# Altium PCB PCB1.PcbDoc (part 1 of 3)
Units mm, origin at the board's own origin, x right, y up, seen from the top; angles counter-clockwise.
Board outline 72 x 48 mm, 6 copper layers (SIG1, GND1, SIG2, PWR, GND2, SIG3), stack 0.816 mm thick; 134 components, 203 nets, 720 pads, 397 vias.
Unrouted connection lines stored in the file: 1.
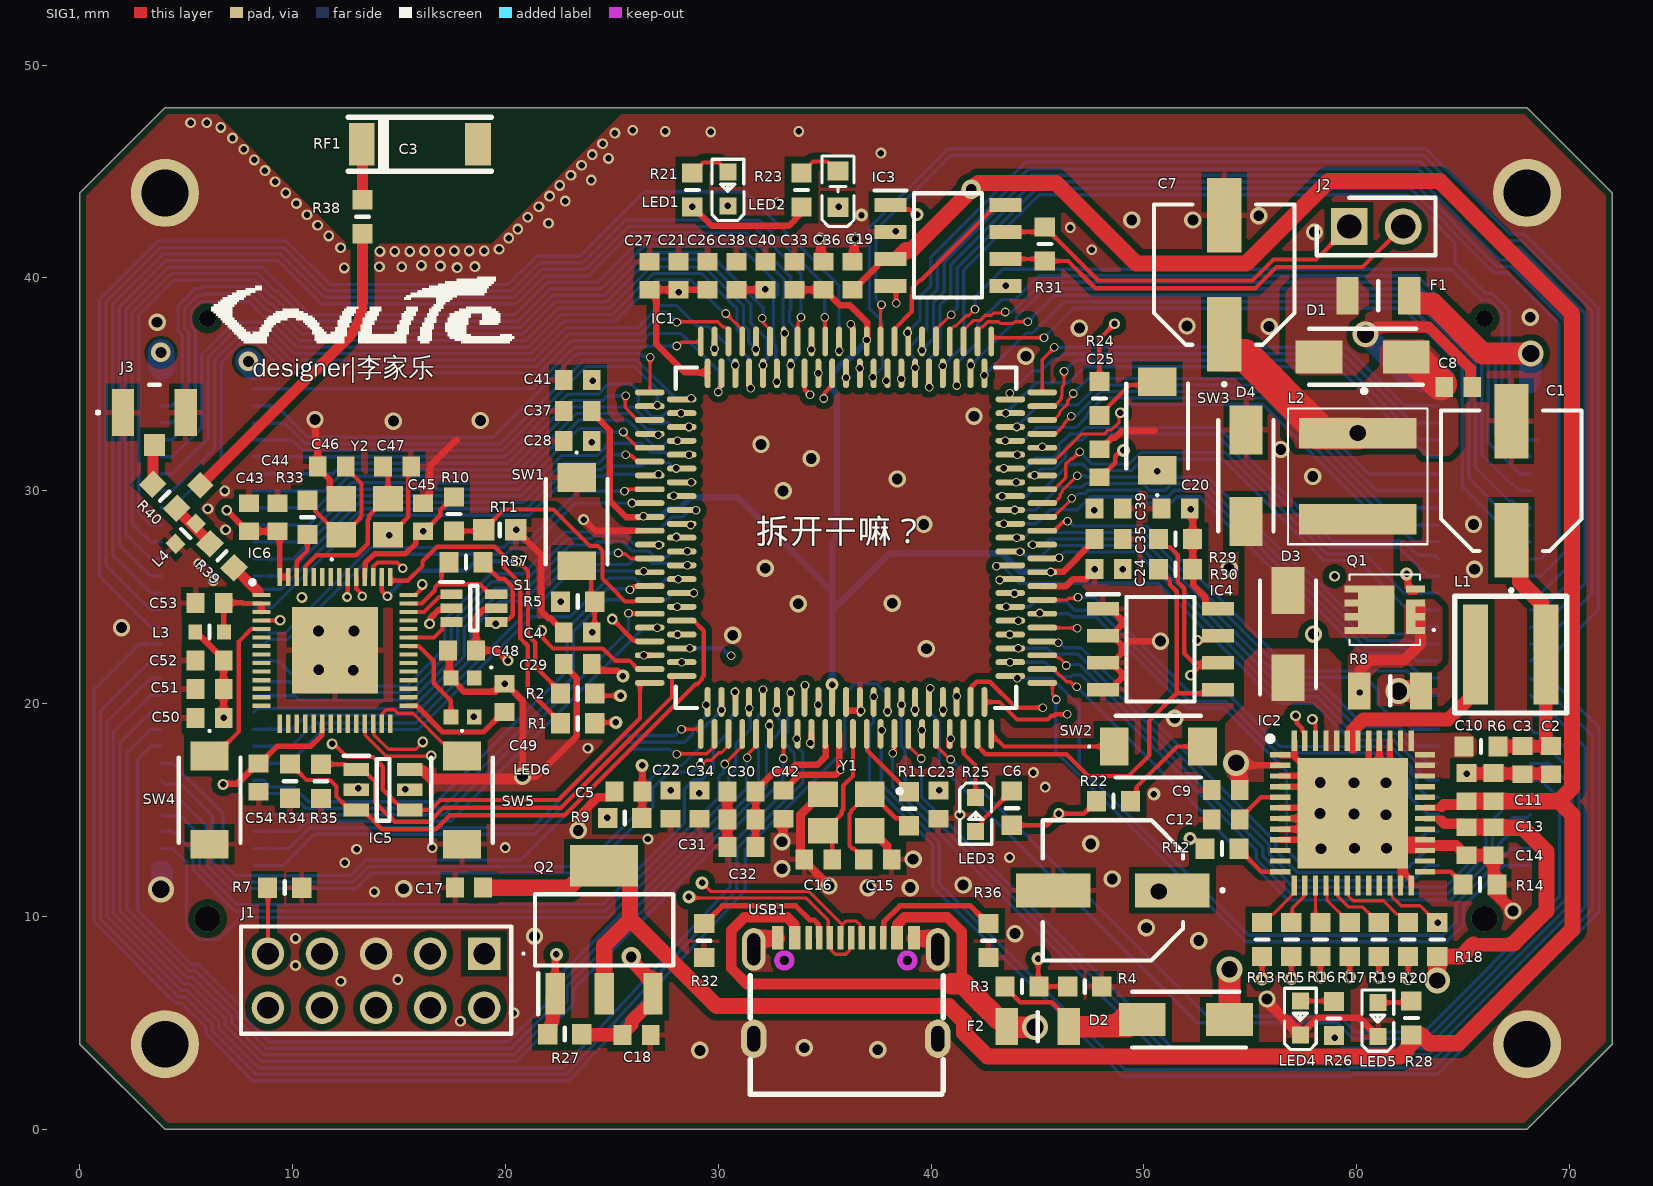
[diagram p0: SIG1 view]
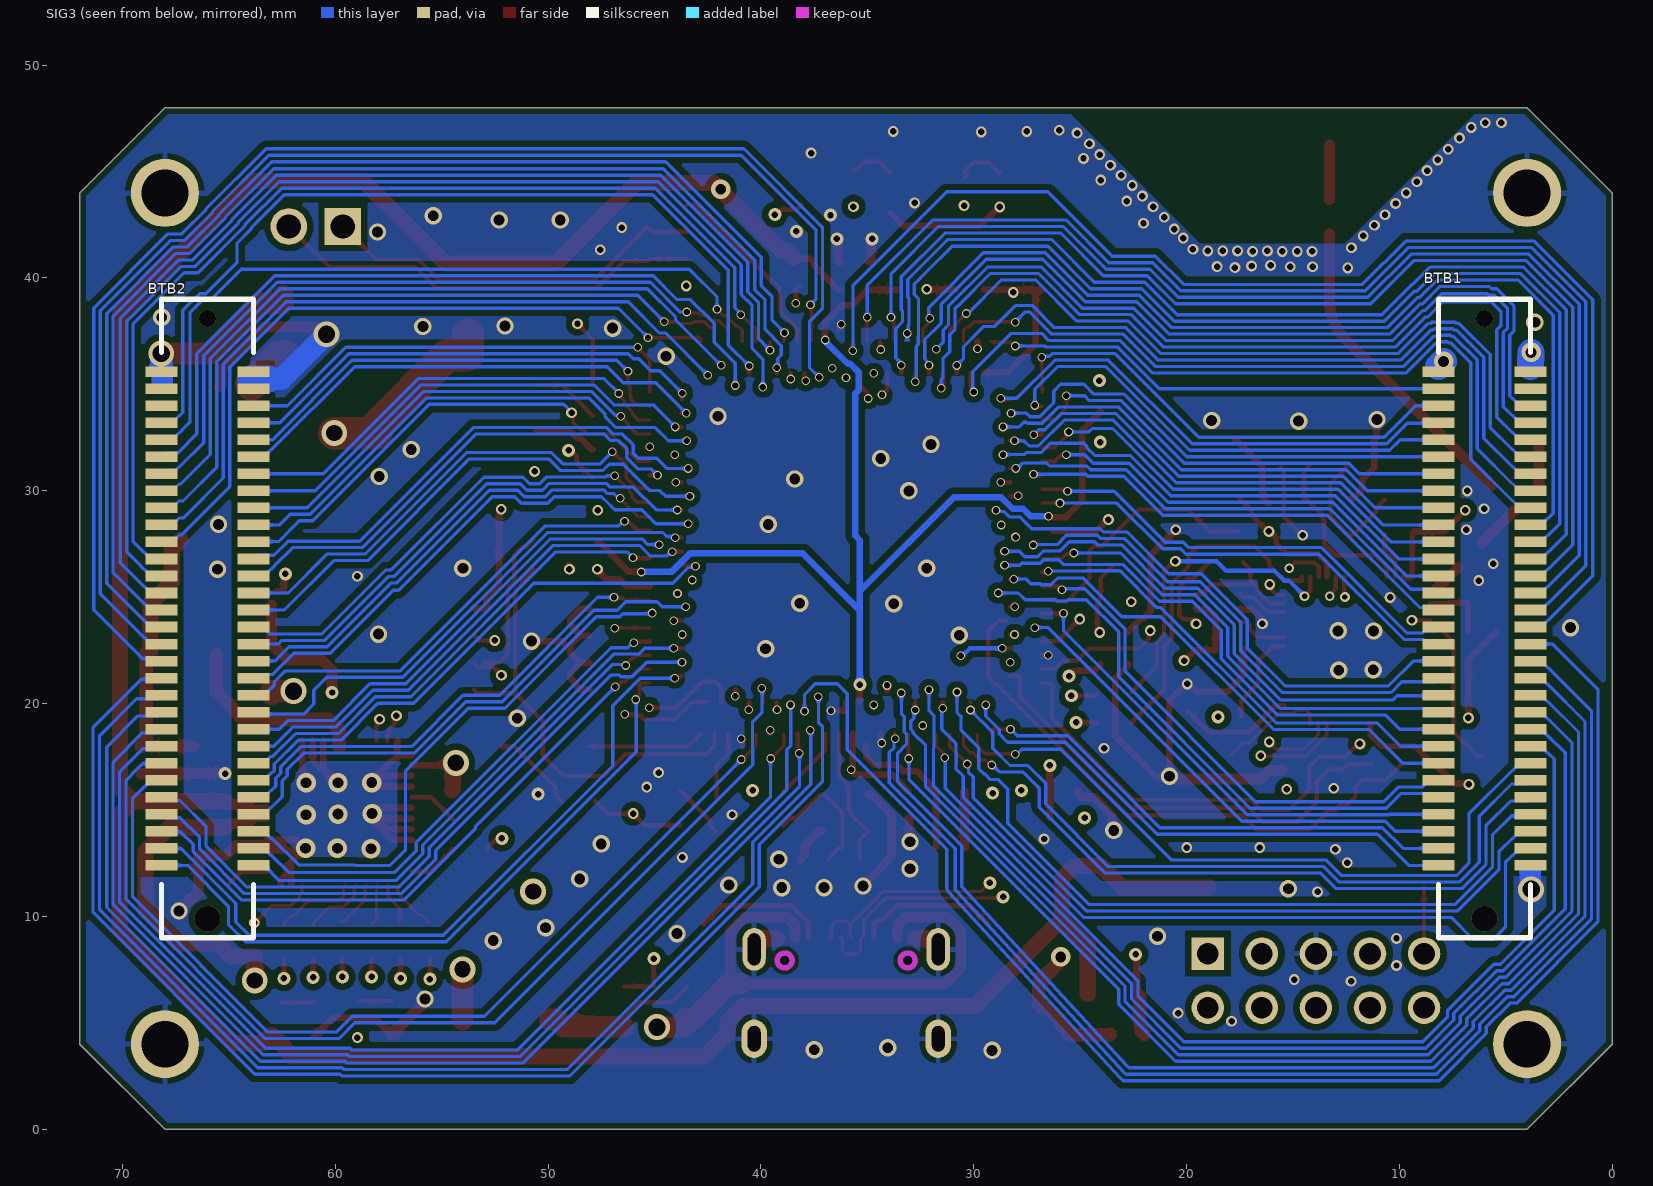
[diagram p1: SIG3 view, seen from below]
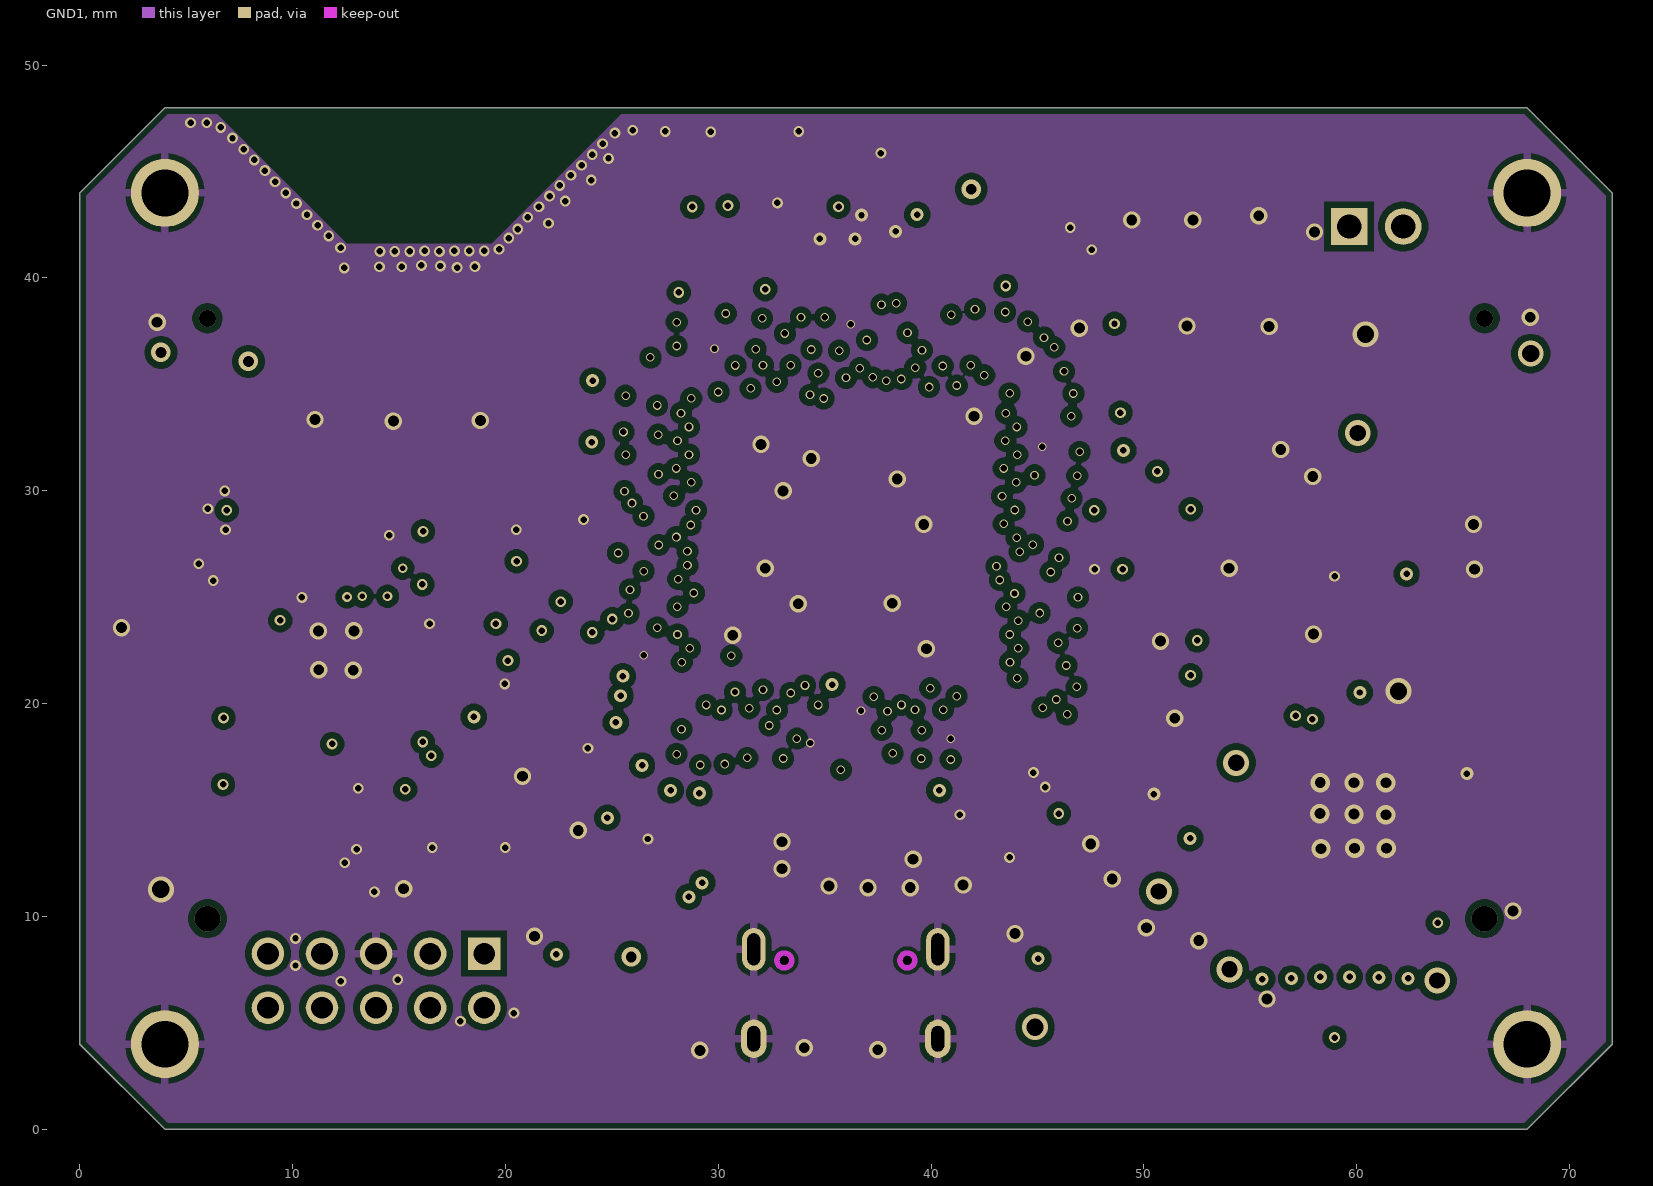
[diagram p2: GND1]
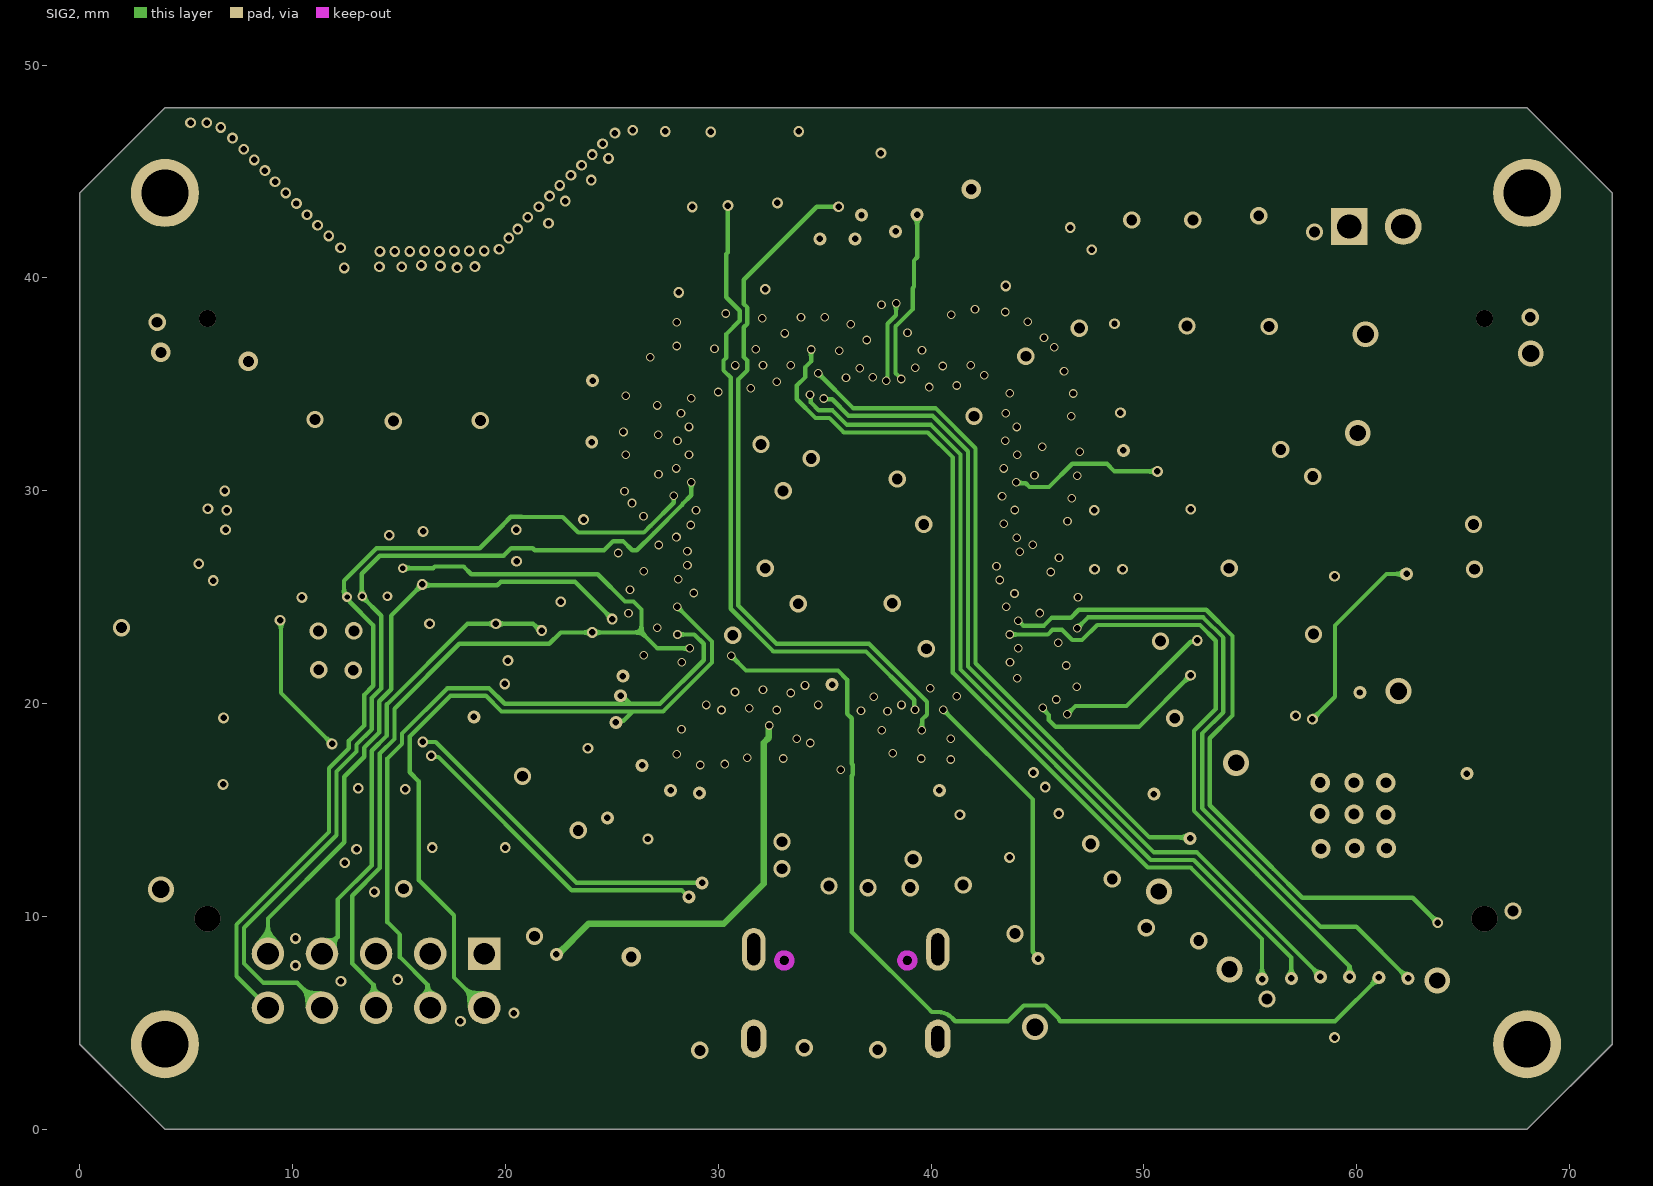
[diagram p3: SIG2]
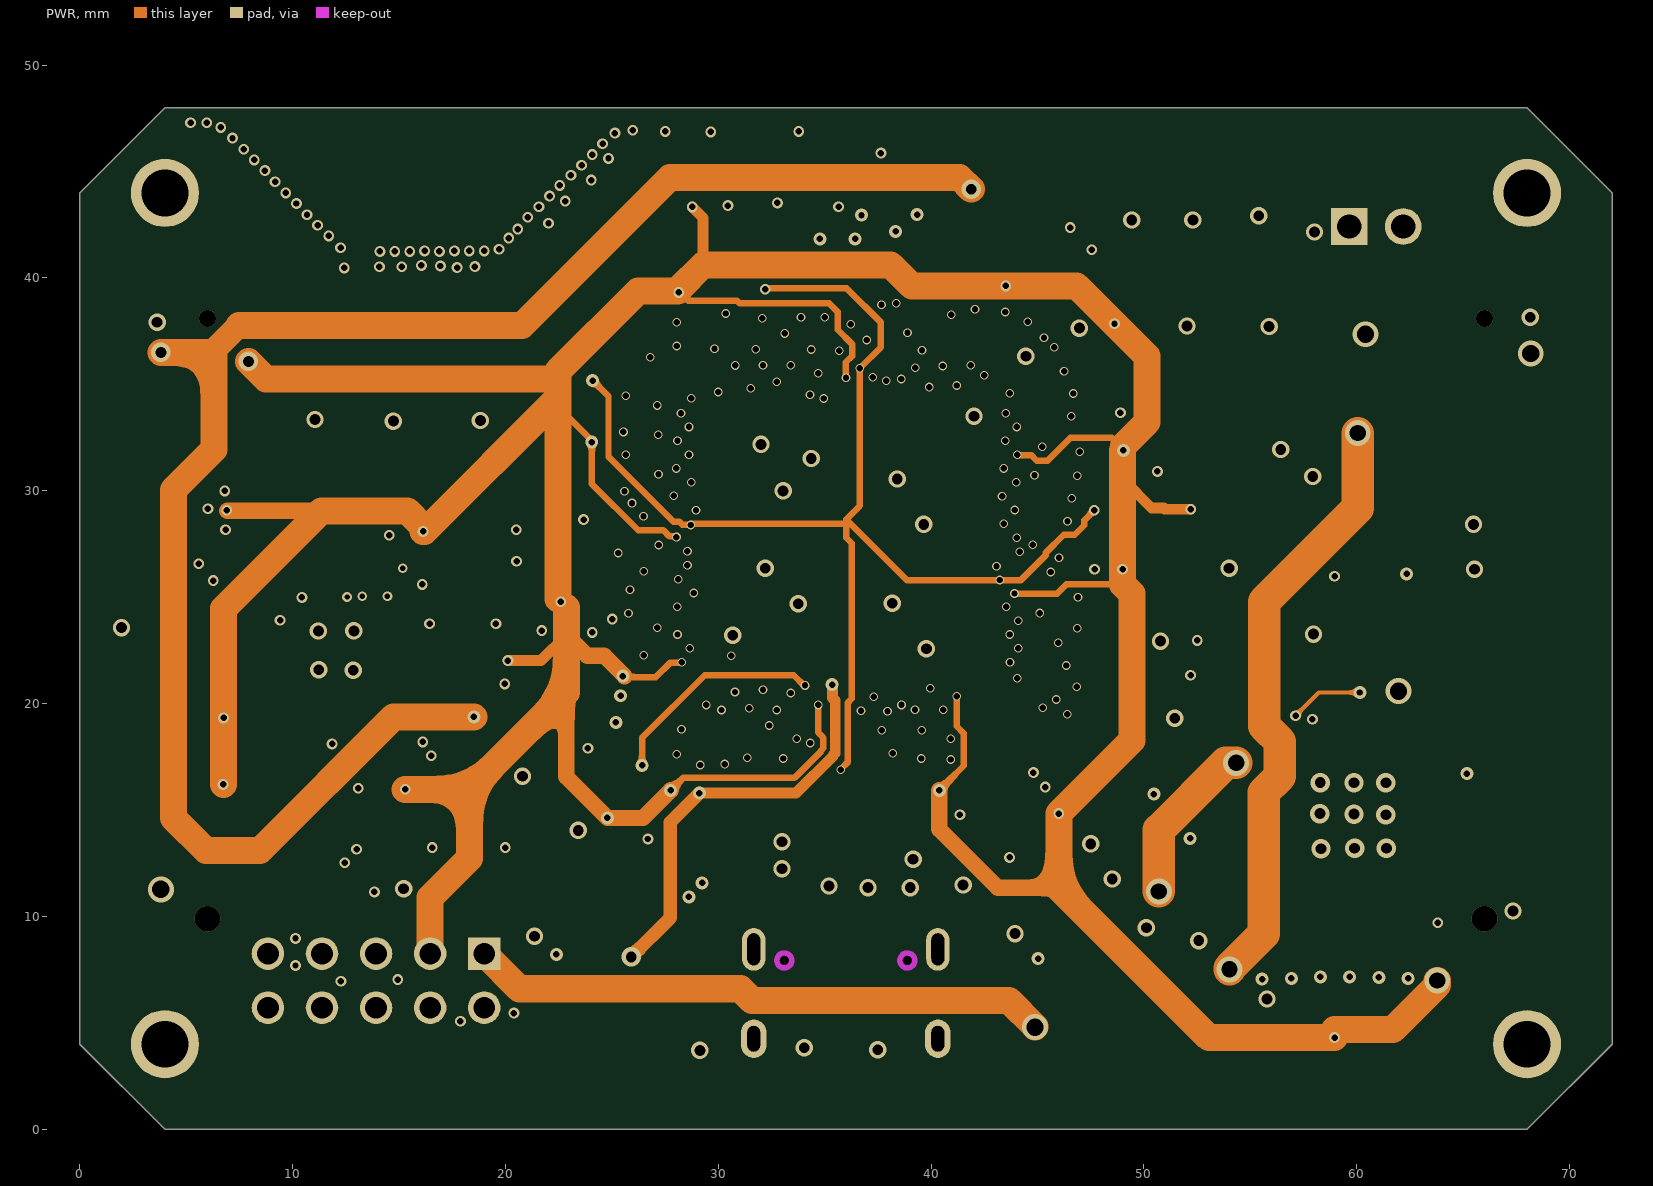
[diagram p4: PWR]
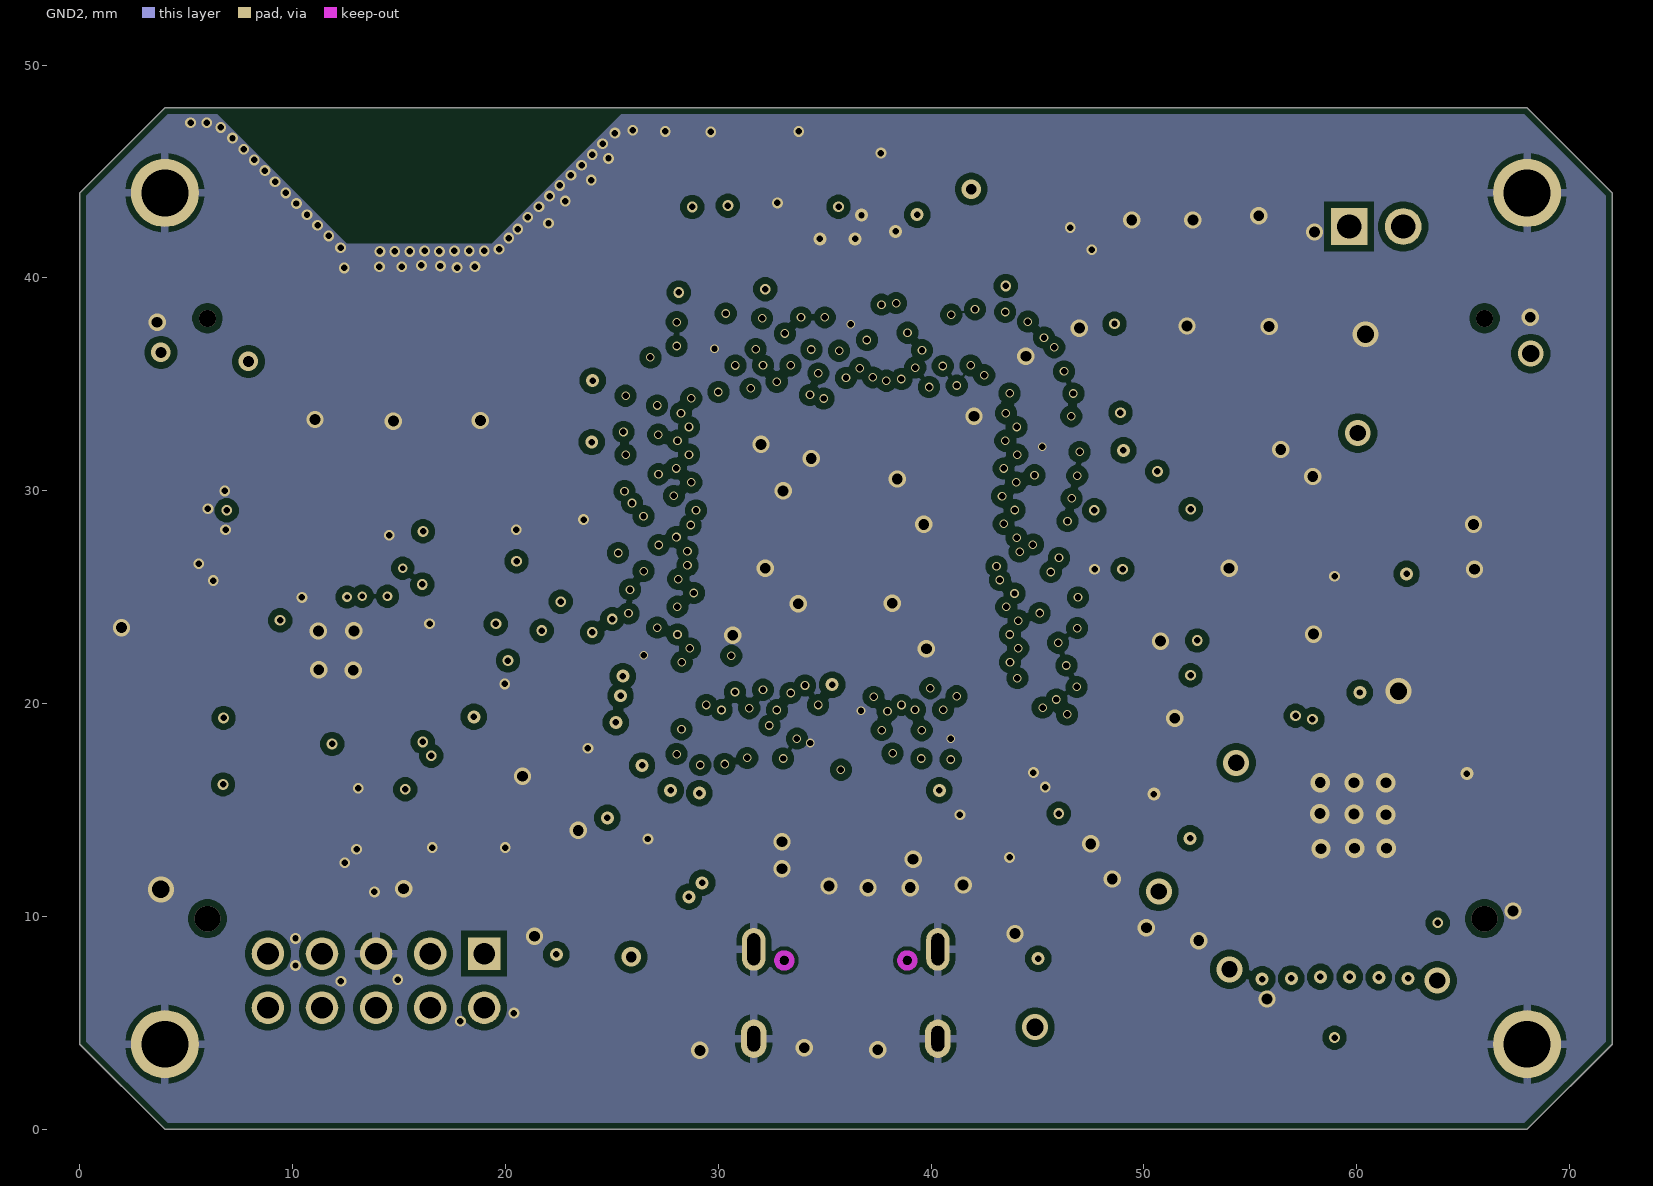
[diagram p5: GND2]

## Layer stack, top to bottom
Top Solder: solder mask 0.0102, Solder Resist, Dk 3.5
SIG1: signal copper 0.035
Dielectric 2: prepreg 0.0711, PP-006, Dk 4.1
GND1: signal copper 0.035
Dielectric 3: prepreg 0.0711, PP-006, Dk 4.1
SIG2: signal copper 0.0356
Dielectric 1: dielectric 0.32, FR-4, Dk 4.8
PWR: signal copper 0.0356
Dielectric 4: prepreg 0.0711, PP-006, Dk 4.1
GND2: signal copper 0.035
Dielectric 5: prepreg 0.0711, PP-006, Dk 4.1
SIG3: signal copper 0.035
Bottom Solder: solder mask 0.0102, Solder Resist, Dk 3.5

## Board outline
4,0 0,4 0,44 4,48 68,48 72,44 72,4 68,0

## Design rules (kind name [scope] priority, off if disabled: settings)
AcuteAngle [All] p1: minimum=3.00000000000000E+0001 checktracksonly=TRUE
AssemblyTestPointUsage [All] p1 off:
AssemblyTestpoint [All] p1 off: testpointundercomponent=TRUE minsize=1.016 maxsize=2.54 preferedsize=1.524 minholesize=0 maxholesize=1.016 preferedholesize=0.813 testpointgrid=0.025 usegrid=TRUE gridtolerance=0 allowsidetop=TRUE allowsidebottom=TRUE
BoardOutlineClearance [All] p1: gap=0.3 ignorepadtopadclearanceinfootprint=FALSE
Clearance ClearanceOvRide [InComponentClass('NetTie') vs InComponentClass('NetTie')] p1: gap=0.305 ignorepadtopadclearanceinfootprint=TRUE except(0.152: Arc-Arc Arc-Track Arc-SMDPad Track-Track Track-SMDPad SMDPad-SMDPad; 0.254: Arc-THPad Arc-Via Track-THPad Track-Via SMDPad-THPad SMDPad-Via THPad-THPad THPad-Via Via-Via)
Clearance KeepoutOvRide [IsKeepOut vs InComponentClass('Opto')] p2: gap=0 ignorepadtopadclearanceinfootprint=TRUE
Clearance UnplatedHoleClearanceOvRide [(HoleDiameter > 0) And (PadIsPlated = 'False') AND (HoleDiameter >= PadYSize_AllLayers)] p3: gap=0.3 ignorepadtopadclearanceinfootprint=FALSE except(0.4: Arc-Hole Track-Hole SMDPad-Hole THPad-Hole Via-Hole Fill-Hole Poly-Hole Region-Hole Text-Hole)
Clearance IPC,500V,Polymer,uncoatedLead [InNetClass('450vNet')] p4: gap=1.5 ignorepadtopadclearanceinfootprint=FALSE except(0.3: Arc-Hole Track-Hole SMDPad-Hole THPad-Hole Via-Hole Fill-Hole Poly-Hole Region-Hole Text-Hole; 1: Arc-Arc Arc-Track Track-Track)
Clearance PowerTrace25mil [(InNetClass('PowerNet'))] p5: gap=0.635 ignorepadtopadclearanceinfootprint=FALSE except(0.152: Arc-Arc Arc-Track Arc-SMDPad Track-Track Track-SMDPad SMDPad-SMDPad; 0.254: Arc-THPad Arc-Via Track-THPad Track-Via SMDPad-THPad SMDPad-Via THPad-THPad THPad-Via Via-Via; 0.305: Arc-Text Arc-Hole Track-Text Track-Hole SMDPad-Text SMDPad-Hole THPad-Text THPad-Hole Via-Text Via-Hole Fill-Text Fill-Hole Poly-Text Poly-Hole Region-Text Region-Hole Text-Text Text-Hole)
Clearance 450V_Clearance [InNetClass('450vNet')] p6 off: gap=3.2 ignorepadtopadclearanceinfootprint=TRUE
Clearance [All] p7: gap=0.305 ignorepadtopadclearanceinfootprint=TRUE except(0.152: Arc-Arc Arc-Track Arc-SMDPad Track-Track Track-SMDPad SMDPad-SMDPad; 0.254: Arc-THPad Arc-Via Track-THPad Track-Via SMDPad-THPad SMDPad-Via THPad-THPad THPad-Via Via-Via)
ComponentClearance ComponentOvRide [IsNetTieComponent] p1: gap=0 collisioncheckmode=3 verticalgap=0.254 showdistances=FALSE
ComponentClearance "450V clearance" [InComponentClass('450vPart')] p2: gap=1.5 collisioncheckmode=3 verticalgap=2540 showdistances=FALSE
ComponentClearance [All] p3: gap=0.305 collisioncheckmode=3 verticalgap=0.254 showdistances=FALSE
Creepage CreepageOvRide [InComponentClass('NetTie') vs InComponentClass('NetTie')] p1: checkdistance=0
Creepage 450V_Creepage [InNetClass('450vNet') vs InNetClass('All Nets')] p2 off: checkdistance=4.6 ignoreinternallayers=FALSE
Creepage [All] p3: checkdistance=0.13
FabricationTestPointUsage [All] p1 off: valid=0 allowmultiple=FALSE
FabricationTestpoint [All] p1 off: side=3 testpointundercomponent=TRUE minsize=1.016 maxsize=2.54 preferedsize=1.524 minholesize=0 maxholesize=1.016 preferedholesize=0.813 testpointgrid=0.025 allowsidetop=TRUE allowsidebottom=TRUE usegrid=TRUE gridtolerance=0
Height [All] p1: minheight=0 maxheight=40 prefheight=12.7
HoleSize HoleSizeOvRide [(HoleDiameter > 0) And (PadIsPlated = 'False') AND (HoleDiameter >= PadYSize_AllLayers)] p1: absolutevalues=TRUE maxlimit=999 minlimit=0.2 maxpercent=80.000 minpercent=20.000
HoleSize [All] p2: absolutevalues=TRUE maxlimit=6 minlimit=0.2 maxpercent=80.000 minpercent=20.000
HoleToHoleClearance SlotOvRide [All vs (HoleDiameter > 0) And (PadIsPlated = 'False') AND (HoleDiameter >= PadYSize_AllLayers)] p1: gap=0 allowstackedmicrovias=TRUE
HoleToHoleClearance [All] p2: gap=0.254 allowstackedmicrovias=TRUE
MinimumAnnularRing PadMinimumAnnularRing [NOT IsVia] p1: minimumring=0.25
MinimumAnnularRing ViaAnnularRing [All] p2: minimumring=0.05
MinimumSolderMaskSliver [All] p1: minsoldermaskwidth=0.076
PolygonConnect PolygonConnect_11 [All vs IsNamedPolygon('GND_L01_P013')] p1: thpad.connectstyle=Direct thpad.reliefconductorwidth=0.254 thpad.reliefentries=4 thpad.polygonreliefangle="90 Angle" thpad.airgapwidth=0.254 smdpad.connectstyle=Relief smdpad.reliefconductorwidth=0.254 smdpad.reliefentries=4 smdpad.polygonreliefangle="90 Angle" smdpad.airgapwidth=0.254 via.connectstyle=Direct via.reliefconductorwidth=0.254 via.reliefentries=4 via.polygonreliefangle="90 Angle" via.airgapwidth=0.254
PolygonConnect PolygonConnect_10 [All vs IsNamedPolygon('GND_L06_P017')] p2: thpad.connectstyle=Relief thpad.reliefconductorwidth=0.254 thpad.reliefentries=4 thpad.polygonreliefangle="90 Angle" thpad.airgapwidth=0.254 smdpad.connectstyle=Relief smdpad.reliefconductorwidth=0.254 smdpad.reliefentries=4 smdpad.polygonreliefangle="90 Angle" smdpad.airgapwidth=0.254 via.connectstyle=Direct via.reliefconductorwidth=0.254 via.reliefentries=4 via.polygonreliefangle="90 Angle" via.airgapwidth=0.254
PolygonConnect PolygonConnect_9 [All vs IsNamedPolygon('GND_L05_P012')] p3: thpad.connectstyle=Relief thpad.reliefconductorwidth=0.381 thpad.reliefentries=4 thpad.polygonreliefangle="90 Angle" thpad.airgapwidth=0.254 smdpad.connectstyle=Relief smdpad.reliefconductorwidth=0.381 smdpad.reliefentries=4 smdpad.polygonreliefangle="90 Angle" smdpad.airgapwidth=0.254 via.connectstyle=Direct via.reliefconductorwidth=0.381 via.reliefentries=4 via.polygonreliefangle="90 Angle" via.airgapwidth=0.254
PolygonConnect PolygonConnect_8 [All vs IsNamedPolygon('GND_L02_P011')] p4: thpad.connectstyle=Relief thpad.reliefconductorwidth=0.381 thpad.reliefentries=4 thpad.polygonreliefangle="90 Angle" thpad.airgapwidth=0.254 smdpad.connectstyle=Relief smdpad.reliefconductorwidth=0.381 smdpad.reliefentries=4 smdpad.polygonreliefangle="90 Angle" smdpad.airgapwidth=0.254 via.connectstyle=Direct via.reliefconductorwidth=0.381 via.reliefentries=4 via.polygonreliefangle="90 Angle" via.airgapwidth=0.254
PolygonConnect PolygonConnect_7 [All vs IsNamedPolygon('GND_L01_P013')] p5: thpad.connectstyle=Relief thpad.reliefconductorwidth=0.381 thpad.reliefentries=4 thpad.polygonreliefangle="90 Angle" thpad.airgapwidth=0.254 smdpad.connectstyle=Relief smdpad.reliefconductorwidth=0.381 smdpad.reliefentries=4 smdpad.polygonreliefangle="90 Angle" smdpad.airgapwidth=0.254 via.connectstyle=Direct via.reliefconductorwidth=0.381 via.reliefentries=4 via.polygonreliefangle="90 Angle" via.airgapwidth=0.254
PolygonConnect PolygonConnect_6 [All vs IsNamedPolygon('NETIC2_47_L01_P009')] p6: connectstyle=Direct reliefconductorwidth=0.254 reliefentries=4 polygonreliefangle="90 Angle" airgapwidth=0.254
PolygonConnect PolygonConnect_5 [All vs IsNamedPolygon('NETIC2_34_L01_P010')] p7: connectstyle=Direct reliefconductorwidth=0.254 reliefentries=4 polygonreliefangle="90 Angle" airgapwidth=0.254
PolygonConnect PolygonConnect_4 [All vs IsNamedPolygon('NETD3_2_L01_P000')] p8: connectstyle=Direct reliefconductorwidth=0.254 reliefentries=4 polygonreliefangle="90 Angle" airgapwidth=0.254
PolygonConnect PolygonConnect_3 [All vs IsNamedPolygon('NETD1_2_L01_P005')] p9: connectstyle=Direct reliefconductorwidth=0.254 reliefentries=4 polygonreliefangle="90 Angle" airgapwidth=0.254
PolygonConnect PolygonConnect_2 [All vs IsNamedPolygon('NETC7_1_L01_P004')] p10: connectstyle=Direct reliefconductorwidth=0.254 reliefentries=4 polygonreliefangle="90 Angle" airgapwidth=0.254
PolygonConnect PolygonConnect_1 [All vs IsNamedPolygon('NETC6_1_L01_P007')] p11: connectstyle=Direct reliefconductorwidth=0.254 reliefentries=4 polygonreliefangle="90 Angle" airgapwidth=0.254
PolygonConnect [All] p12: connectstyle=Relief reliefconductorwidth=0.381 reliefentries=4 polygonreliefangle="90 Angle" airgapwidth=0.254
RoutingVias [All] p1: holewidth=0.3 width=20 viastyle="Through Hole" minholewidth=0.3 minwidth=0.406 maxholewidth=2 maxwidth=3.048
SMDEntry [All] p1 off: side=TRUE corner=TRUE anyangle=FALSE
SMDToCorner [All] p1 off: distance=30000
ShortCircuit ShortCircuitOvRide [InComponentClass('NetTie') OR((HoleDiameter > 0) And (PadIsPlated = 'False') AND (HoleDiameter >= PadYSize_AllLayers)) vs InComponentClass('NetTie') OR ((HoleDiameter > 0) And (PadIsPlated = 'False') AND (HoleDiameter >= PadYSize_AllLayers))] p1: allowed=TRUE
ShortCircuit [All] p2: allowed=FALSE
SilkToSilkClearance [All] p1: silktosilkclearance=0.025
SilkToSolderMaskClearance [IsPad] p1: minsilkscreentomaskgap=0.025 clearancetoexposedcopper=TRUE
SolderMaskExpansion [All] p1: expansion=0.051 istentingtop=FALSE
UnRoutedNet [All] p1: checkbadconnections=TRUE
Width [All] p1: maxlimit=5.08 minlimit=0.102 preferedwidth=0.254
17 further rules are at their usual default settings.

## Components (designator, comment, footprint, x,y, rotation, side; value= is the part's Value field where it differs from the comment)
BTB1 "BTB_0.8mm_60Pin_Father" BTB_0.8MM_60PIN_F 6,24 r0 bottom
BTB2 "BTB_0.8mm_60Pin_Father" BTB_0.8MM_60PIN_F 66,24 r0 bottom
C1 "6SVQP100M" 16SVF180M 67.259,30.475 r0 top
C2 "22uF" CAPC1608X90N 69.113,17.35 r90 top
C3 "100nF" CAPC1608X90N 67.793,17.35 r90 top
C4 "100nF" CAPC1608X90N 23.393,23.344 r0 top
C5 "100nF" CAPC1608X90N 25.781,15.864 r180 top
C6 "100uF" 16SVF180M 48.539,11.228 r90 top
C7 "100uF" 16SVF180M 53.772,40.159 r0 top
C8 "100nF" CAPC1608X90N 64.77,34.876 r180 top
C9 "100nF" CAPC1608X90N 53.845,15.953 r0 top
C10 "4.7uF" CAPC1608X90N 65.151,16.08 r90 top
C11 "100nF" CAPC1608X90N 66.421,16.08 r90 top
C12 "100nF" CAPC1608X90N 53.845,14.556 r0 top
C13 "4.7uF" CAPC1608X90N 65.151,13.54 r90 top
C14 "100nF" CAPC1608X90N 66.421,13.54 r90 top
C15 "9pF" CAPC1608X90N 37.49,12.676 r0 top
C16 "9pF" CAPC1608X90N 34.697,12.676 r0 top
C17 "1uF" CAPC1608X90N 18.288,11.355 r180 top
C18 "2.2uF" CAPC1608X90N 26.162,4.421 r180 top
C19 "100nF" CAPC1608X90N 36.297,40.106 r90 top
C20 "100nF" CAPC1608X90N 51.486,29.161 r0 top
C21 "10uF" CAPC1608X90N 28.132,40.106 r270 top
C22 "100nF" CAPC1608X90N 27.762,15.259 r90 top
C23 "100nF" CAPC1608X90N 40.348,15.259 r90 top
C24 "100nF" CAPC1608X90N 48.336,26.316 r0 top
C25 "100nF" CAPC1608X90N 47.904,31.294 r270 top
C26 "100nF" CAPC1608X90N 29.493,40.106 r270 top
C27 "100nF" CAPC1608X90N 26.772,40.106 r270 top
C28 "100nF" CAPC1608X90N 23.393,32.336 r0 top
C29 "100nF" CAPC1608X90N 23.393,21.871 r0 top
C30 "10uF" CAPC1608X90N 31.09,15.864 r0 top
C31 "100nF" CAPC1608X90N 31.09,14.556 r0 top
C32 "1nF" CAPC1608X90N 31.09,13.26 r0 top
C33 "10uF" CAPC1608X90N 33.575,40.106 r270 top
C34 "100nF" CAPC1608X90N 29.108,15.259 r90 top
C35 "100nF" CAPC1608X90N 48.336,27.738 r180 top
C36 "100nF" CAPC1608X90N 34.936,40.106 r270 top
C37 "100nF" CAPC1608X90N 23.393,33.758 r0 top
C38 "2.2uF" CAPC1608X90N 30.854,40.106 r270 top
C39 "100nF" CAPC1608X90N 48.336,29.161 r180 top
C40 "100nF" CAPC1608X90N 32.214,40.106 r270 top
C41 "100nF" CAPC1608X90N 23.393,35.206 r0 top
C42 "100nF" CAPC1608X90N 33.071,15.259 r90 top
C43 "1uF" CAPC1608X90N 7.95,28.754 r270 top
C44 "10nF" CAPC1608X90N 9.296,28.754 r90 top
C45 "100nF" CAPC1608X90N 16.129,28.754 r90 top
C46 "15pF" CAPC1608X90N 11.836,31.142 r180 top
C47 "15pF" CAPC1608X90N 14.91,31.142 r180 top
C48 "100nF" CAPC1608X90N 17.958,22.506 r0 top
C49 "1uF" CAPC1608X90N 19.964,20.271 r270 top
C50 "10uF" CAPC1608X90N 6.096,19.331 r0 top
C51 "1uF" CAPC1608X90N 6.096,20.683 r0 top
C52 "100nF" CAPC1608X90N 6.096,22.036 r0 top
C53 "100nF" CAPC1608X90N 6.096,24.741 r0 top
C54 "100nF" CAPC1608X90N 8.407,16.527 r90 top
D1 "SS34A" DIOM5026X262N 60.274,36.298 r180 top
D2 "SS34A" DIOM5026X262N 51.968,5.158 r180 top
D3 "SS34A" DIOM5026X262N 56.769,23.268 r90 top
D4 "SMAJ28CA" DIONM5226X262N 54.788,30.71 r270 top
F1 "JK-nSMD050-30" RESC3116X65N 61.011,39.168 r0 top
F2 "JK-nSMD050-30" RESC3116X65N 45.009,4.827 r0 top
IC1 "S32K344EHT1MPBST" S32K344EHT1MPBST 36,27.8 r90 top
IC2 "TLF35584QVVS2" QFN50P700X700X90-49N-D 59.807,14.854 r0 top
IC3 "TJA1042T_3_1J" SOIC127P600X175-8N 40.792,41.53 r0 top
IC4 "AT24C02D-SSHM-B" SOIC127P600X175-8N 50.775,22.557 r0 top
IC5 "SN74LVC1G373DBVR" SOT95P280X145-6N 14.249,15.953 r0 top
IC6 "ESP32-S3FH4R2" QFN40P700X700X90-57N-D 11.989,22.506 r0 top
J1 "排针_P4*2_2.54" ZXPZ25425PZZ 18.999,8.256 r180 top
J2 "排针_P2_2.54" HDRV2W66P0X254_1X2_508X250X880P 59.639,42.419 r0 top
J3 "BWIPX-1-001E" BWIPX1001E 3.505,33.682 r270 top
L1 "XAL5050-223MEC" XAL5030 67.234,22.303 r0 top
L2 "XAL6060-223MEC" XAL6060822MEB 60.046,31.142 r270 top
L3 "2.4nH" LQM18FN100M00D 6.096,23.369 r0 top
L4 "3nH" LQM18FN100M00D 4.978,27.992 r45 top
LED1 "NCD0603R1" LED0603-RD 30.455,44.188 r90 top
LED2 "NCD0603G1" LED0603-RD_1 35.625,44.175 r90 top
LED3 "NCD0603B1" LED0603-RD 42.088,14.784 r270 top
LED4 "NCD0603W1" LED0603-RD 57.353,5.234 r90 top
LED5 "NCD0603W1" LED0603-RD 60.995,5.158 r90 top
LED6 "WS2812B-2020" WS2812B2020 17.983,20.296 r90 top
Q1 "IPZ40N04S5L-7R4" IPZ40N04S5L7R4ATMA1 61.316,24.411 r90 top
Q2 "BCP56-16TX" SOT230P700X180-4N 24.638,9.374 r90 top
R1 "0Ω" RESC1608X55N 23.393,19.077 r180 top
R2 "0Ω" RESC1608X55N 23.393,20.474 r180 top
R3 "6.2K" RESC1608X55N 44.272,6.707 r0 top
R4 "10K" RESC1608X55N 47.219,6.707 r0 top
R5 "10K" RESC1608X55N 23.393,24.792 r180 top
R6 "0Ω" RESC1608X55N 65.837,17.985 r0 top
R7 "10K" RESC1608X55N 9.627,11.355 r180 top
R8 "0.05Ω" RESC3116X65N 61.57,20.601 r180 top
R9 "0Ω" RESC1608X55N 25.603,14.632 r0 top
R10 "10K" RESC1608X55N 17.577,28.907 r270 top
R11 "47Ω" RESC1608X55N 38.964,15.064 r270 top
R12 "100Ω" RESC1608X55N 53.67,13.184 r0 top
R13 "100Ω" RESC1608X55N 55.55,8.917 r90 top
R14 "NC" RESC1608X55N 65.786,11.508 r0 top
R15 "100Ω" RESC1608X55N 56.921,8.917 r90 top
R16 "100Ω" RESC1608X55N 58.293,8.917 r90 top
R17 "0Ω" RESC1608X55N 59.665,8.917 r90 top
R18 "1K" RESC1608X55N 63.779,8.917 r90 top
R19 "0Ω" RESC1608X55N 61.036,8.917 r90 top
R20 "0Ω" RESC1608X55N 62.408,8.917 r90 top
R21 "10K" RESC1608X55N 28.778,44.137 r270 top
R22 "4.7K" RESC1608X55N 48.565,15.419 r180 top
R23 "10K" RESC1608X55N 33.909,44.138 r270 top
R24 "4.7K" RESC1608X55N 47.904,34.342 r90 top
R25 "10K" RESC1608X55N 43.79,15.089 r270 top
R26 "10K" RESC1608X55N 58.928,5.208 r270 top
R27 "2.2K" RESC1608X55N 22.784,4.472 r0 top
R28 "10K" RESC1608X55N 62.56,5.234 r270 top
R29 "10K" RESC1608X55N 51.486,27.738 r0 top
R30 "10K" RESC1608X55N 51.486,26.316 r0 top
R31 "120Ω" RESC1608X55N 45.339,41.595 r90 top
R32 "5.1K" RESC1608X55N 29.337,8.866 r270 top
R33 "22Ω" RESC1608X55N 10.693,28.754 r90 top
R34 "10K" RESC1608X55N 9.881,16.359 r90 top
R35 "10K" RESC1608X55N 11.328,16.352 r90 top
R36 "5.1K" RESC1608X55N 42.697,8.866 r270 top
R37 "NC" RESC1608X55N 18.142,26.646 r0 top
R38 "0Ω" RESC1608X55N 13.284,42.878 r90 top
R39 "0Ω" RESC1608X55N 6.68,26.951 r135 top
R40 "0Ω" RESC1608X55N 3.988,29.745 r135 top
RF1 "CA-C03" CA-C03 15.265,48.161 r270 top
RT1 "NCP18XH103F03RB" THRMC1608X95N 19.736,28.17 r0 top
S1 "SGM3157" SOT65P230X110-6N 18.517,24.487 r0 top
SW1 "TS-1088-AR02016" TS1088AR02016 23.343,28.551 r270 top
SW2 "TS-1088-AR02016" TS1088AR02016 50.673,17.985 r0 top
SW3 "TS-1088-AR02016" TS1088AR02016 50.622,33.047 r90 top
SW4 "TS-1088-AR02016" TS1088AR02016 6.096,15.47 r270 top
SW5 "TS-1088-AR02016" TS1088AR02016 17.958,15.47 r270 top
USB1 "TYPE-C 16PIN 2MD(073)" USB-C-SMD_TYPE-C-6PIN-2MD-073 35.992,6.631 r0 top
Y1 "X322516MLB4SI" X322516MLB4SI 36.017,14.886 r180 top
Y2 "X322540MPB4SI" X322540MPB4SI 13.386,28.78 r0 top

## Footprints (in the part's own frame and the unit in brackets; to place one, negate y for a bottom-side part, rotate by r counter-clockwise, add the part's x,y. Pads: shape width x height; smd on the part's side, far side on the other; paste and mask are expansions set on the pad)
16SVF180M [mm]
  rect 1.6x3.5 smd: 1(0,-2.8) 2(0,2.8)
  silkscreen extent -3.3,-5.2 3.3,3.3, body extent -3.3,-3.65 3.3,3.65, height 5.98
BTB_0.8MM_60PIN_F [mm] "0.8单槽板对板公母座合高5.0，母座，60PIN"
  rect 1.5x0.5 smd: 1(2.16,11.6) 2(2.16,10.8) 3(2.16,10) 4(2.16,9.2) 5(2.16,8.4) 6(2.16,7.6) 7(2.16,6.8) 8(2.16,6) 9(2.16,5.2) 10(2.16,4.4) 11(2.16,3.6) 12(2.16,2.8) 13(2.16,2) 14(2.16,1.2) 15(2.16,0.4) 16(2.16,-0.4) 17(2.16,-1.2) 18(2.16,-2) 19(2.16,-2.8) 20(2.16,-3.6) 21(2.16,-4.4) 22(2.16,-5.2) 23(2.16,-6) 24(2.16,-6.8) 25(2.16,-7.6) 26(2.16,-8.4) 27(2.16,-9.2) 28(2.16,-10) 29(2.16,-10.8) 30(2.16,-11.6) 31(-2.16,-11.6) 32(-2.16,-10.8) 33(-2.16,-10) 34(-2.16,-9.2) 35(-2.16,-8.4) 36(-2.16,-7.6) 37(-2.16,-6.8) 38(-2.16,-6) 39(-2.16,-5.2) 40(-2.16,-4.4) 41(-2.16,-3.6) 42(-2.16,-2.8) 43(-2.16,-2) 44(-2.16,-1.2) 45(-2.16,-0.4) 46(-2.16,0.4) 47(-2.16,1.2) 48(-2.16,2) 49(-2.16,2.8) 50(-2.16,3.6) 51(-2.16,4.4) 52(-2.16,5.2) 53(-2.16,6) 54(-2.16,6.8) 55(-2.16,7.6) 56(-2.16,8.4) 57(-2.16,9.2) 58(-2.16,10) 59(-2.16,10.8) 60(-2.16,11.6)
  silkscreen extent -2.16,-15 2.16,15, body extent -3,-14.9 3,14.9, height 4.44
BWIPX1001E [mm]
  rect 2.2x1.05 smd: 1(0,-1.475) 3(0,1.475)
  rect 1.05x1 smd: 2(1.525,0)
  silkscreen extent -1.3,-2.7 0.05,0.25, body extent -1.3,-1.9 1.95,1.9, height 1.55
CA-C03 [mm]
  rect 2x1.2 smd: 1(1.87,-2.017) 2(1.87,3.444)
  silkscreen extent 0.6,-2.65 3.14,4.08
CAPC1608X90N [mm]
  rect 0.83x0.94 smd: 1(-0.66,0) 2(0.66,0)
  body extent -0.8,-0.4 0.8,0.4, height 0.9
DIOM5026X262N [mm]
  rect 2.2x1.55 smd: 1(-2.05,0) 2(2.05,0)
  silkscreen extent -2.83,-1.31 2.52,1.31, body extent -2.52,-1.31 2.52,1.31, height 2.62
DIONM5226X262N [mm]
  rect 2.3x1.55 smd: 1(-2.15,0) 2(2.15,0)
  silkscreen extent -2.61,-1.3 2.61,1.3, body extent -2.61,-1.3 2.61,1.3, height 2.31
HDRV2W66P0X254_1X2_508X250X880P [mm]
  rect 1.725x1.725 hole 1.15: 1(0,0)
  round 1.725 hole 1.15: 2(2.54,0)
  silkscreen extent -1.52,-1.35 4.06,1.35, body extent -1.27,-1.25 3.81,1.25, height 8.8
IPZ40N04S5L7R4ATMA1 [mm]
  rect 0.34x0.45 smd: 1(-0.975,-1.675) 2(-0.325,-1.675) 3(0.325,-1.675)
  rect 1.64x0.45 smd: 1(-0.325,-1.225)
  rect 0.34x0.9 smd: 4(0.975,-1.45)
  rect 2.29x1.71 smd: 5(0,0.4)
  rect 0.34x0.65 smd: 5(0.975,1.58) 6(0.325,1.58) 7(-0.325,1.58) 8(-0.975,1.58)
  silkscreen extent -1.65,-2.35 1.65,1.65
LED0603-RD [mm]
  rect 0.8x0.8 smd: 1(-0.799,0) 2(0.799,0)
  silkscreen extent -1.49,-0.75 1.39,0.76
LED0603-RD_1 [mm]
  rect 0.9x1 smd: 1(-0.85,0) 2(0.85,0)
  silkscreen extent -1.75,-0.75 1.55,0.75
LQM18FN100M00D [mm]
  rect 0.65x0.7 smd: 1(-0.675,0) 2(0.675,0)
  silkscreen extent 0,-0.3 0,0.3, body extent -0.8,-0.4 0.8,0.4, height 0.8
QFN40P700X700X90-57N-D [mm]
  rect 0.85x0.2 smd: 1(-3.45,2.6) 2(-3.45,2.2) 3(-3.45,1.8) 4(-3.45,1.4) 5(-3.45,1) 6(-3.45,0.6) 7(-3.45,0.2) 8(-3.45,-0.2) 9(-3.45,-0.6) 10(-3.45,-1) 11(-3.45,-1.4) 12(-3.45,-1.8) 13(-3.45,-2.2) 14(-3.45,-2.6) 29(3.45,-2.6) 30(3.45,-2.2) 31(3.45,-1.8) 32(3.45,-1.4) 33(3.45,-1) 34(3.45,-0.6) 35(3.45,-0.2) 36(3.45,0.2) 37(3.45,0.6) 38(3.45,1) 39(3.45,1.4) 40(3.45,1.8) 41(3.45,2.2) 42(3.45,2.6)
  rect 0.2x0.85 smd: 15(-2.6,-3.45) 16(-2.2,-3.45) 17(-1.8,-3.45) 18(-1.4,-3.45) 19(-1,-3.45) 20(-0.6,-3.45) 21(-0.2,-3.45) 22(0.2,-3.45) 23(0.6,-3.45) 24(1,-3.45) 25(1.4,-3.45) 26(1.8,-3.45) 27(2.2,-3.45) 28(2.6,-3.45) 43(2.6,3.45) 44(2.2,3.45) 45(1.8,3.45) 46(1.4,3.45) 47(1,3.45) 48(0.6,3.45) 49(0.2,3.45) 50(-0.2,3.45) 51(-0.6,3.45) 52(-1,3.45) 53(-1.4,3.45) 54(-1.8,3.45) 55(-2.2,3.45) 56(-2.6,3.45)
  rect 4.05x4.05 smd: 57(0,0)
  silkscreen extent -3.97,3.1 -3.78,3.3, body extent -3.55,-3.55 3.55,3.55, height 0.9
QFN50P700X700X90-49N-D [mm]
  rect 0.95x0.25 smd: 1(-3.4,2.75) 2(-3.4,2.25) 3(-3.4,1.75) 4(-3.4,1.25) 5(-3.4,0.75) 6(-3.4,0.25) 7(-3.4,-0.25) 8(-3.4,-0.75) 9(-3.4,-1.25) 10(-3.4,-1.75) 11(-3.4,-2.25) 12(-3.4,-2.75) 25(3.4,-2.75) 26(3.4,-2.25) 27(3.4,-1.75) 28(3.4,-1.25) 29(3.4,-0.75) 30(3.4,-0.25) 31(3.4,0.25) 32(3.4,0.75) 33(3.4,1.25) 34(3.4,1.75) 35(3.4,2.25) 36(3.4,2.75)
  rect 0.25x0.95 smd: 13(-2.75,-3.4) 14(-2.25,-3.4) 15(-1.75,-3.4) 16(-1.25,-3.4) 17(-0.75,-3.4) 18(-0.25,-3.4) 19(0.25,-3.4) 20(0.75,-3.4) 21(1.25,-3.4) 22(1.75,-3.4) 23(2.25,-3.4) 24(2.75,-3.4) 37(2.75,3.4) 38(2.25,3.4) 39(1.75,3.4) 40(1.25,3.4) 41(0.75,3.4) 42(0.25,3.4) 43(-0.25,3.4) 44(-0.75,3.4) 45(-1.25,3.4) 46(-1.75,3.4) 47(-2.25,3.4) 48(-2.75,3.4)
  rect 5.2x5.2 smd: 49(0,0)
  silkscreen extent -4,3.38 -3.75,3.62, body extent -3.55,-3.55 3.55,3.55, height 0.9
RESC1608X55N [mm]
  rect 0.9x0.95 smd: 1(-0.8,0) 2(0.8,0)
  silkscreen extent 0,-0.3 0,0.3, body extent -0.8,-0.4 0.8,0.4, height 0.55
RESC3116X65N [mm]
  rect 1.05x1.75 smd: 1(-1.45,0) 2(1.45,0)
  silkscreen extent 0,-0.69 0,0.69, body extent -1.55,-0.79 1.55,0.79, height 0.65
S32K344EHT1MPBST [mm]
  rrect100% 1.4x0.28 smd: 1(-9.22,6.825) 2(-7.72,6.5) 3(-9.22,6.175) 4(-7.72,5.85) 5(-9.22,5.525) 6(-7.72,5.2) 7(-9.22,4.875) 8(-7.72,4.55) 9(-9.22,4.225) 10(-7.72,3.9) 11(-9.22,3.575) 12(-7.72,3.25) 13(-9.22,2.925) 14(-7.72,2.6) 15(-9.22,2.275) 16(-7.72,1.95) 17(-9.22,1.625) 18(-7.72,1.3) 19(-9.22,0.975) 20(-7.72,0.65) 21(-9.22,0.325) 22(-7.72,0) 23(-9.22,-0.325) 24(-7.72,-0.65) 25(-9.22,-0.975) 26(-7.72,-1.3) 27(-9.22,-1.625) 28(-7.72,-1.95) 29(-9.22,-2.275) 30(-7.72,-2.6) 31(-9.22,-2.925) 32(-7.72,-3.25) 33(-9.22,-3.575) 34(-7.72,-3.9) 35(-9.22,-4.225) 36(-7.72,-4.55) 37(-9.22,-4.875) 38(-7.72,-5.2) 39(-9.22,-5.525) 40(-7.72,-5.85) 41(-9.22,-6.175) 42(-7.72,-6.5) 43(-9.22,-6.825) 87(9.22,-6.825) 88(7.72,-6.5) 89(9.22,-6.175) 90(7.72,-5.85) 91(9.22,-5.525) 92(7.72,-5.2) 93(9.22,-4.875) 94(7.72,-4.55) 95(9.22,-4.225) 96(7.72,-3.9) 97(9.22,-3.575) 98(7.72,-3.25) 99(9.22,-2.925) 100(7.72,-2.6) 101(9.22,-2.275) 102(7.72,-1.95) 103(9.22,-1.625) 104(7.72,-1.3) 105(9.22,-0.975) 106(7.72,-0.65) 107(9.22,-0.325) 108(7.72,0) 109(9.22,0.325) 110(7.72,0.65) 111(9.22,0.975) 112(7.72,1.3) 113(9.22,1.625) 114(7.72,1.95) 115(9.22,2.275) 116(7.72,2.6) 117(9.22,2.925) 118(7.72,3.25) 119(9.22,3.575) 120(7.72,3.9) 121(9.22,4.225) 122(7.72,4.55) 123(9.22,4.875) 124(7.72,5.2) 125(9.22,5.525) 126(7.72,5.85) 127(9.22,6.175) 128(7.72,6.5) 129(9.22,6.825)
  rrect100% 0.28x1.4 smd: 44(-6.825,-9.22) 45(-6.5,-7.72) 46(-6.175,-9.22) 47(-5.85,-7.72) 48(-5.525,-9.22) 49(-5.2,-7.72) 50(-4.875,-9.22) 51(-4.55,-7.72) 52(-4.225,-9.22) 53(-3.9,-7.72) 54(-3.575,-9.22) 55(-3.25,-7.72) 56(-2.925,-9.22) 57(-2.6,-7.72) 58(-2.275,-9.22) 59(-1.95,-7.72) 60(-1.625,-9.22) 61(-1.3,-7.72) 62(-0.975,-9.22) 63(-0.65,-7.72) 64(-0.325,-9.22) 65(0,-7.72) 66(0.325,-9.22) 67(0.65,-7.72) 68(0.975,-9.22) 69(1.3,-7.72) 70(1.625,-9.22) 71(1.95,-7.72) 72(2.275,-9.22) 73(2.6,-7.72) 74(2.925,-9.22) 75(3.25,-7.72) 76(3.575,-9.22) 77(3.9,-7.72) 78(4.225,-9.22) 79(4.55,-7.72) 80(4.875,-9.22) 81(5.2,-7.72) 82(5.525,-9.22) 83(5.85,-7.72) 84(6.175,-9.22) 85(6.5,-7.72) 86(6.825,-9.22) 130(6.825,9.22) 131(6.5,7.72) 132(6.175,9.22) 133(5.85,7.72) 134(5.525,9.22) 135(5.2,7.72) 136(4.875,9.22) 137(4.55,7.72) 138(4.225,9.22) 139(3.9,7.72) 140(3.575,9.22) 141(3.25,7.72) 142(2.925,9.22) 143(2.6,7.72) 144(2.275,9.22) 145(1.95,7.72) 146(1.625,9.22) 147(1.3,7.72) 148(0.975,9.22) 149(0.65,7.72) 150(0.325,9.22) 151(0,7.72) 152(-0.325,9.22) 153(-0.65,7.72) 154(-0.975,9.22) 155(-1.3,7.72) 156(-1.625,9.22) 157(-1.95,7.72) 158(-2.275,9.22) 159(-2.6,7.72) 160(-2.925,9.22) 161(-3.25,7.72) 162(-3.575,9.22) 163(-3.9,7.72) 164(-4.225,9.22) 165(-4.55,7.72) 166(-4.875,9.22) 167(-5.2,7.72) 168(-5.525,9.22) 169(-5.85,7.72) 170(-6.175,9.22) 171(-6.5,7.72) 172(-6.825,9.22)
  silkscreen extent -10.5,-8 8,8, body extent -9.5,-9.5 9.5,9.5, height 1.75
SOIC127P600X175-8N [mm]
  rect 1.5x0.65 smd: 1(-2.7,1.905) 2(-2.7,0.635) 3(-2.7,-0.635) 4(-2.7,-1.905) 5(2.7,-1.905) 6(2.7,-0.635) 7(2.7,0.635) 8(2.7,1.905)
  silkscreen extent -3.45,-2.45 1.6,2.58, body extent -3,-2.45 3,2.45, height 1.75
SOT65P230X110-6N [mm]
  rect 1.05x0.45 smd: 1(-1.05,0.65) 2(-1.05,0) 3(-1.05,-0.65) 4(1.05,-0.65) 5(1.05,0) 6(1.05,0.65)
  silkscreen extent -1.58,-1.05 0.18,1.22, body extent -1.15,-1.05 1.15,1.05, height 1.1
SOT95P280X145-6N [mm]
  rect 1.2x0.6 smd: 1(-1.25,0.95) 2(-1.25,0) 3(-1.25,-0.95) 4(1.25,-0.95) 5(1.25,0) 6(1.25,0.95)
  silkscreen extent -1.85,-1.45 0.3,1.6, body extent -1.4,-1.45 1.4,1.45, height 1.2
SOT230P700X180-4N [mm]
  rect 1.95x0.9 smd: 1(-3,2.3) 2(-3,0) 3(-3,-2.3)
  rect 1.95x3.2 smd: 4(3,0)
  silkscreen extent -3.98,-3.25 1.68,3.25, body extent -3.5,-3.33 3.5,3.33, height 1.65
THRMC1608X95N [mm]
  rect 1x1 smd: 1(-0.75,0) 2(0.75,0)
  silkscreen extent 0,-0.3 0,0.3, body extent -0.8,-0.4 0.8,0.4, height 0.95
TS1088AR02016 [mm]
  rect 1.35x1.8 smd: 1(-2.075,0) 2(2.075,0)
  silkscreen extent -3.3,-1.45 2,1.45, body extent -2.62,-1.45 2.62,1.45, height 2.1
USB-C-SMD_TYPE-C-6PIN-2MD-073 [mm]
  rect 0.55x1.1 smd: 1(-3.2,2.375) 2(-2.4,2.375) 11(2.4,2.375) 12(3.2,2.375)
  rect 0.3x1.1 smd: 3(-1.75,2.375) 4(-1.25,2.375) 5(-0.75,2.375) 6(-0.25,2.375) 7(0.25,2.375) 8(0.75,2.375) 9(1.25,2.375) 10(1.75,2.375)
  oval 1.1x2 hole 0.6 slot 1.5 at 90 deg: 13(-4.325,1.825) 14(4.325,1.825)
  oval 1.2x1.8 hole 0.6 slot 1.2 at 90 deg: 13(-4.325,-2.375) 14(4.325,-2.375)
  Keep-Out Layer board cut-out: -2.54,1.305 -2.541,1.374 -2.595,1.5 -2.694,1.597 -2.821,1.649 -2.959,1.649 -3.086,1.597 -3.184,1.5 -3.239,1.374 -3.24,1.305 -3.239,1.236 -3.184,1.11 -3.086,1.013 -2.959,0.961 -2.821,0.961 -2.694,1.013 -2.595,1.11 -2.541,1.236 -2.54,1.305 -2.54,1.305
  Keep-Out Layer board cut-out: 3.24,1.305 3.239,1.374 3.185,1.5 3.086,1.597 2.959,1.649 2.821,1.649 2.694,1.597 2.596,1.5 2.541,1.374 2.54,1.305 2.541,1.236 2.596,1.11 2.694,1.013 2.821,0.961 2.959,0.961 3.086,1.013 3.185,1.11 3.239,1.236 3.24,1.305 3.24,1.305
  Multi-Layer keep-out circle w0.254: c-2.89,1.305 r0.35
  Multi-Layer keep-out circle w0.254: c2.89,1.305 r0.35
  silkscreen extent -4.5,-4.97 4.57,0.6
WS2812B2020 [mm]
  rect 0.7x0.7 smd: 1(0.915,-0.55) 2(0.915,0.55) 3(-0.915,0.55) 4(-0.915,-0.55)
  silkscreen extent 1.35,-1.4 1.45,-1.3, body extent -1.1,-1 1.1,1, height 0.84
X322516MLB4SI [mm]
  rect 1.4x1.2 smd: 1(-1.1,-0.85) 2(1.1,-0.85) 3(1.1,0.85) 4(-1.1,0.85)
  silkscreen extent -2.6,-1.1 -2.4,-0.9, body extent -1.6,-1.25 1.6,1.25, height 0.7
X322540MPB4SI [mm]
  rect 1.4x1.2 smd: 1(-1.1,-0.85) 2(1.1,-0.85) 3(1.1,0.85) 4(-1.1,0.85)
  silkscreen extent -1.6,-2.05 -1.5,-1.95, body extent -1.68,-1.33 1.68,1.33, height 0.9
XAL5030 [mm]
  rect 1.18x4.7 smd: 1(-1.655,0) 2(1.655,0)
  silkscreen extent -2.64,-2.74 2.64,2.74, body extent -2.64,-2.74 2.64,2.74, height 5.2
XAL6060822MEB [mm]
  rect 1.43x5.5 smd: 1(-1.57,0) 2(2.47,0)
  silkscreen extent -3.65,-3.28 3.65,3.28, body extent -2.82,-3.38 3.74,3.38, height 6.11
ZXPZ25425PZZ [mm]
  rect 1.53x1.53 hole 1.02: 1(0,0)
  round 1.53 hole 1.02: 2(0,2.54) 3(2.54,0) 4(2.54,2.54) 5(5.08,0) 6(5.08,2.54) 7(7.62,0) 8(7.62,2.54) 9(10.16,0) 10(10.16,2.54)
  silkscreen extent -1.9,-1.27 11.43,3.77, body extent -1.27,-1.23 11.43,3.77, height 8.8

## Part data
C1: "Capacitor Polarised", Manufacturer_Name=Panasonic, Mouser Part Number=667-6SVQP100M, Arrow Part Number=6SVQP100M, Arrow Price/Stock=https://www.arrow.com/en/products/6svqp100m/panasonic?region=nac, Datasheet Link=http://industrial.panasonic.com/cdbs/www-data/pdf/AAB8000/AAB8000C225.pdf, Height=6mm, Manufacturer_Part_Number=6SVQP100M, Mouser Price/Stock=https://www.mouser.co.uk/ProductDetail/Panasonic/6SVQP100M?qs=Gd3Cm49KlLNMtA4%252BBRbdEg%3D%3D
C2 C3 C4 C5 C8 C9 C10 C11 C12 C13 C14 C15 C16 C17 C18 C19 C20 C21 C22 C23 C24 C25 C26 C27 C28 C29 C30 C31 C32 C33 C34 C35 C36 C37 C38 C39 C40 C41 C42 C43 C44 C45 C46 C47 C48 C49 C50 C51 C52 C53 C54: library part C0603, "Capacitor CC0603KRX7R9BB104", Arrow Part Number=CC0603KRX7R9BB104, Manufacturer_Name=YAGEO, Mouser Part Number=603-CC603KRX7R9BB104, Arrow Price/Stock=https://www.arrow.com/en/products/cc0603krx7r9bb104/yageo?region=europe, Datasheet Link=https://componentsearchengine.com/Datasheets/2/CC0603KRX7R9BB104.pdf, Height=0.9mm, Manufacturer_Part_Number=CC0603KRX7R9BB104, Mouser Price/Stock=https://www.mouser.co.uk/ProductDetail/YAGEO/CC0603KRX7R9BB104?qs=vTakOoo5QyLvVCYM2ge8LQ%3D%3D
C6 C7: library part KNM2100UF35V149EC0055, Equivalent Series Resistance(ESR)=80mΩ@100kHz, JLCPCB Part Class="Extended Part", LCSC Part Name="100uF ±20% 35V", Lifetime @ Temp=2000hrs@105℃, Manufacturer=KNSCHA(科尼盛), Operating Temperature=-55℃~+105℃, Rated Voltage=35V, Ripple Current=1.516A@100kHz, Tolerance=±20%, Add into BOM=yes, Convert to PCB=yes, Datasheet=https://atta.szlcsc.com/upload/public/pdf/source/20220426/5696DDB0B22BE88A3CF8D074D2573DF7.pdf, Device=KNM2100UF35V149EC0055, L=7mm, Lead Spacing=2.5mm, Manufacturer Part=KNM2100UF35V149EC0055, Supplier=LCSC, Supplier Footprint=SMD,D6.3xL7mm, Supplier Part=C2982822, Symbol=KNM2100UF35V149EC0055, φD=6.3mm
D1 D2 D3: "Diode", Manufacturer_Name="HY Electronic", Datasheet Link=https://datasheet.datasheetarchive.com/originals/distributors/Datasheets-3/DSA-43252.pdf, Height=2.62mm, Manufacturer_Part_Number=SS34A
D4: "TVS Diode (Bi-directional)", Manufacturer_Name=Bourns, Mouser Part Number=652-SMAJ28CA, Arrow Part Number=SMAJ28CA, Arrow Price/Stock=https://www.arrow.com/en/products/smaj28ca/bourns?utm_currency=USD&region=nac, Datasheet Link=https://www.bourns.com/data/global/pdfs/SMAJ.pdf, Height=2.62mm, Manufacturer_Part_Number=SMAJ28CA, Mouser Price/Stock=https://www.mouser.co.uk/ProductDetail/Bourns/SMAJ28CA?qs=A3H9pljuJ8Rc2FOBsYvsOw%3D%3D
F1 F2: library part R1206, Manufacturer_Name="UNI-ROYAL(Uniroyal Elec)", Manufacturer_Part_Number=1206W4F1002T5E, Datasheet Link=https://datasheet.lcsc.com/szlcsc/Uniroyal-Elec-1206W4F1002T5E_C17902.pdf, Height=0.65mm
IC1: "Integrated Circuit", Manufacturer_Name=NXP, Mouser Part Number=771-S32K344EHT1MPBST, Arrow Part Number=S32K344EHT1MPBST, Arrow Price/Stock=https://www.arrow.com/en/products/s32k344eht1mpbst/nxp-semiconductors?region=nac, Datasheet Link=https://www.nxp.com/docs/en/data-sheet/S32K3xx.pdf, Height=1.75mm, Manufacturer_Part_Number=S32K344EHT1MPBST, Mouser Price/Stock=https://www.mouser.co.uk/ProductDetail/NXP-Semiconductors/S32K344EHT1MPBST?qs=Rp5uXu7WBW8J9n%252BPyXjBKQ%3D%3D
IC2: "Integrated Circuit", Manufacturer_Name=Infineon, Mouser Part Number=N/A, Datasheet Link=http://www.farnell.com/datasheets/2820312.pdf, Height=0.9mm, Manufacturer_Part_Number=TLF35584QVVS2, Mouser Price/Stock=https://www.mouser.co.uk/ProductDetail/Infineon-Technologies/TLF35584QVVS2?qs=l9vRkkPGK2mbsGIT9lqTbg%3D%3D
IC3: "Integrated Circuit", Arrow Part Number=TJA1042T/3/1J, Manufacturer_Name=NXP, Mouser Part Number=771-TJA1042T/3/1J, Arrow Price/Stock=https://www.arrow.com/en/products/tja1042t31j/nxp-semiconductors?utm_currency=USD&region=nac, Datasheet Link=http://www.nxp.com/docs/en/data-sheet/TJA1042.pdf, Height=1.75mm, Manufacturer_Part_Number=TJA1042T/3/1J, Mouser Price/Stock=https://www.mouser.co.uk/ProductDetail/NXP-Semiconductors/TJA1042T-3-1J?qs=gNSudQoqUYC0yGbZKhqwlQ%3D%3D
IC4: "Integrated Circuit", Manufacturer_Name=Microchip, Mouser Part Number=556-AT24C02D-SSHM-B, Arrow Part Number=AT24C02D-SSHM-B, Arrow Price/Stock=https://www.arrow.com/en/products/at24c02d-sshm-b/microchip-technology?region=europe, Datasheet Link=http://www.atmel.com/images/Atmel-8871-SEEPROM-AT24C01D-02D-Datasheet.pdf, Height=1.75mm, Manufacturer_Part_Number=AT24C02D-SSHM-B, Mouser Price/Stock=https://www.mouser.co.uk/ProductDetail/Microchip-Technology/AT24C02D-SSHM-B?qs=l5F7KFZg3O5xH%2Fgf1EqmGg%3D%3D
IC5: "Integrated Circuit", Manufacturer_Name="Texas Instruments", Mouser Part Number=595-SN74LVC1G373DBVR, Arrow Part Number=SN74LVC1G373DBVR, Arrow Price/Stock=https://www.arrow.com/en/products/sn74lvc1g373dbvr/texas-instruments?region=nac, Datasheet Link=http://www.ti.com/lit/gpn/sn74lvc1g373, Height=1.45mm, Manufacturer_Part_Number=SN74LVC1G373DBVR, Mouser Price/Stock=https://www.mouser.co.uk/ProductDetail/Texas-Instruments/SN74LVC1G373DBVR?qs=pajgIaoyDUhGcf%252BSO1j05w%3D%3D
IC6: "Integrated Circuit", Manufacturer_Name="Espressif Systems", Mouser Part Number=356-ESP32-S3FH4R2, Datasheet Link=https://eu.mouser.com/datasheet/2/891/esp32_s3_datasheet_en-2946743.pdf, Height=0.9mm, Manufacturer_Part_Number=ESP32-S3FH4R2, Mouser Price/Stock=https://www.mouser.co.uk/ProductDetail/Espressif-Systems/ESP32-S3FH4R2?qs=tlsG%2FOw5FFjPrwkmZSBQNA%3D%3D
J1: "Connector", Manufacturer_Name=Megastar, Manufacturer_Part_Number=ZX-PZ2.54-2-5PZZ, Datasheet Link=https://www.lcsc.com/datasheet/lcsc_datasheet_2311221544_Megastar-ZX-PZ2-54-2-5PZZ_C7501276.pdf, Height=8.7mm
J2: "Connector", Manufacturer_Name="Ckmtw(Shenzhen Cankemeng)", Manufacturer_Part_Number=B-2100S02P-A110, Datasheet Link=https://datasheet.lcsc.com/lcsc/2210192330_Ckmtw-Shenzhen-Cankemeng-B-2100S02P-A110_C124375.pdf, Height=8.8mm
J3: "Connector", Manufacturer_Name="BAT WIRELESS", Datasheet Link=https://datasheet.lcsc.com/szlcsc/2012231509_BAT-WIRELESS-BWIPX-1-001E_C496552.pdf, Height=1.45mm, Manufacturer_Part_Number=BWIPX-1-001E
L1: "Inductor", Manufacturer_Name=COILCRAFT, Mouser Part Number=994-XAL5050-223MEC, Datasheet Link=https://www.coilcraft.com/getmedia/49bc46c8-4b2c-45b9-9b6c-2eaa235ea698/xal50xx.pdf, Manufacturer_Part_Number=XAL5050-223MEC, Mouser Price/Stock=https://www.mouser.co.uk/ProductDetail/Coilcraft/XAL5050-223MEC?qs=zCSbvcPd3pZDBbGj4RTtgg%3D%3D
L2: "Inductor", Manufacturer_Name=COILCRAFT, Mouser Part Number=994-XAL6060-223MEC, Datasheet Link=http://www.mouser.com/datasheet/2/597/xal60xx-270658.pdf, Height=6mm, Manufacturer_Part_Number=XAL6060-223MEC, Mouser Price/Stock=https://www.mouser.co.uk/ProductDetail/Coilcraft/XAL6060-223MEC?qs=zCSbvcPd3paScsLbTnAUcA%3D%3D
L3 L4: library part L0603, "Inductor", Arrow Part Number=LQM18FN100M00D, Manufacturer_Name="Murata Electronics", Mouser Part Number=81-LQM18FN100M00D, Arrow Price/Stock=https://www.arrow.com/en/products/lqm18fn100m00d/murata-manufacturing?region=nac, Datasheet Link=https://psearch.en.murata.com/inductor/product/LQM18FN100M00%23.html, Height=0.9mm, Manufacturer_Part_Number=LQM18FN100M00D, Mouser Price/Stock=https://www.mouser.co.uk/ProductDetail/Murata-Electronics/LQM18FN100M00D?qs=2%252BM72CStpDR8E8wEVXa5xw%3D%3D
LED1: "C84263", Color Temperature=-, Emitted Color=红色, Forward Current=20mA, Forward Voltage (VF)=1.6V~2.6V, JLCPCB Part Class="Extended Part", Lens Color=无色透明透镜, Manufacturer=国星光电, Operating Temperature=-30℃~+85℃, Power Dissipation=65mW, Add into BOM=yes, Convert to PCB=yes, Datasheet=https://atta.szlcsc.com/upload/public/pdf/source/20200820/C84263_DABC6A75E58F576973B407FDBA283D60.pdf, Device=NCD0603R1_C84263, Diode Configuration=独立二极管, Dominant Wavelength=615nm~630nm, Lamp Holder Type=-, LCSC Part Name=NCD0603R1, Luminous Intensity=80mcd~220mcd, Manufacturer Part=NCD0603R1, Mounting Sytle=-, Peak Wavelength=-, Supplier=LCSC, Supplier Footprint=0603, Supplier Part=C84263, Symbol=FC-DA1608HRK-620D, Viewing Angle=130°
LED2: Emitted Color=翠绿色, Forward Current=10mA, Forward Voltage (VF)=2.6V~3.6V, JLCPCB Part Class="Extended Part", Lens Color=无色透明透镜, Manufacturer=国星光电, Operating Temperature=-30℃~+85℃, Power Dissipation=72mW, Add into BOM=yes, Convert to PCB=yes, Datasheet=https://atta.szlcsc.com/upload/public/pdf/source/20200820/C84267_04BA7703640BAC111D09F5EFB971FBF3.pdf, Device=NCD0603G1, Dominant Wavelength=515nm~530nm, LCSC Part Name=NCD0603G1, Luminous Intensity=330mcd~900mcd, Manufacturer Part=NCD0603G1, Supplier=LCSC, Supplier Footprint=0603, Supplier Part=C84267, Symbol=FC-D1608UGK-520D10, Viewing Angle=130°
LED3: Emitted Color=蓝色, Forward Current=10mA, Forward Voltage (VF)=2.6V~3.6V, JLCPCB Part Class="Extended Part", Lens Color=无色透明透镜, Manufacturer=国星光电, Operating Temperature=-30℃~+85℃, Power Dissipation=72mW, Add into BOM=yes, Convert to PCB=yes, Datasheet=https://atta.szlcsc.com/upload/public/pdf/source/20200820/C84266_6A3CDBEFA72C6CAD68EDA53474ADAE6C.pdf, Device=NCD0603B1, Dominant Wavelength=463nm~475nm, LCSC Part Name=NCD0603B1, Luminous Intensity=80mcd~220mcd, Manufacturer Part=NCD0603B1, Supplier=LCSC, Supplier Footprint=0603, Supplier Part=C84266, Symbol=FC-DA1608BK-470H10, Viewing Angle=130°
LED4 LED5: Emitted Color=白色, Forward Current=5mA, Forward Voltage (VF)=2.6V~3.6V, JLCPCB Part Class="Extended Part", Lens Color=雾状黄透镜, Manufacturer=国星光电, Operating Temperature=-30℃~+85℃, Power Dissipation=72mW, Add into BOM=yes, Convert to PCB=yes, Datasheet=https://atta.szlcsc.com/upload/public/pdf/source/20200820/C84265_479E6193713348A548E5CD6D9278BF16.pdf, Device=NCD0603W1, LCSC Part Name=NCD0603W1, Luminous Intensity=200mcd~300mcd, Manufacturer Part=NCD0603W1, Supplier=LCSC, Supplier Footprint=0603, Supplier Part=C84265, Symbol=FC-D1608WD-460H5, Viewing Angle=130°
LED6: "LED (Multiple)", Manufacturer_Name=Worldsemi, Datasheet Link=https://www.alldatasheet.com/datasheet-pdf/pdf/1134522/WORLDSEMI/WS2812B-2020.html, Height=0.84mm, Manufacturer_Part_Number=WS2812B-2020
Q1: Continuous Drain Current (Id)=-, JLCPCB Part Class="Extended Part", Manufacturer=Infineon(英飞凌), Add into BOM=yes, Convert to PCB=yes, Datasheet=https://atta.szlcsc.com/upload/public/pdf/source/20200525/C537509_E051284C2A14EA783116935AFB10216D.pdf, Device=IPZ40N04S5L-7R4, Drain Source On Resistance (RDS(on)@Vgs,Id)=-, Drain Source Voltage (Vdss)=-, Gate Threshold Voltage (Vgs(th)@Id)=-, Input Capacitance (Ciss@Vds)=-, LCSC Part Name=IPZ40N04S5L-7R4, Manufacturer Part=IPZ40N04S5L-7R4, Power Dissipation (Pd)=-, Reverse Transfer Capacitance (Crss@Vds)=-, Supplier=LCSC, Supplier Footprint=TSDSON-8-EP(3.3x3.3), Supplier Part=C537509, Symbol=IPZ40N04S5L-7R4, Total Gate Charge (Qg@Vgs)=-, Type=-
Q2: "Transistor", Arrow Part Number=BCP56-16,115, Manufacturer_Name=Nexperia, Mouser Part Number=771-BCP56-16-T/R, Arrow Price/Stock=https://www.arrow.com/en/products/bcp56-16115/nexperia?utm_currency=USD&region=europe, Datasheet Link=https://assets.nexperia.com/documents/data-sheet/BCP56_BCX56_BC56PA.pdf, Height=1.8mm, Manufacturer_Part_Number=BCP56-16,115, Mouser Price/Stock=https://www.mouser.co.uk/ProductDetail/Nexperia/BCP56-16115?qs=me8TqzrmIYWgUkLKLwMxWw%3D%3D
R1 R2 R3 R4 R5 R6 R7 R9 R10 R11 R12 R13 R14 R15 R16 R17 R18 R19 R20 R21 R22 R23 R24 R25 R26 R27 R28 R29 R30 R31 R32 R33 R34 R35 R36 R37 R38 R39 R40: library part R0603, "Resistor 0603WAF1002T5E", Manufacturer_Name="UNI-ROYAL(Uniroyal Elec)", Manufacturer_Part_Number=0603WAF1002T5E, Datasheet Link=https://datasheet.lcsc.com/szlcsc/Uniroyal-Elec-0603WAF1002T5E_C25804.pdf, Height=0.55mm
R8: library part R1206, "Resistor 1206W4F1002T5E", Manufacturer_Name="UNI-ROYAL(Uniroyal Elec)", Manufacturer_Part_Number=1206W4F1002T5E, Datasheet Link=https://datasheet.lcsc.com/szlcsc/Uniroyal-Elec-1206W4F1002T5E_C17902.pdf, Height=0.65mm
RT1: "Thermistor", Manufacturer_Name="Murata Electronics", Mouser Part Number=81-NCP18XH103F03RB, Arrow Part Number=NCP18XH103F03RB, Arrow Price/Stock=https://www.arrow.com/en/products/ncp18xh103f03rb/murata-manufacturing?utm_currency=USD&region=nac, Datasheet Link=https://componentsearchengine.com/Datasheets/2/NCP18XH103F03RB.pdf, Height=0.95mm, Manufacturer_Part_Number=NCP18XH103F03RB, Mouser Price/Stock=https://www.mouser.co.uk/ProductDetail/Murata-Electronics/NCP18XH103F03RB?qs=k3rQb2PKXqkF9YvF09qsvw%3D%3D
S1: "Switch", Manufacturer_Name=SGMICRO, Manufacturer_Part_Number=SGM3157YC6/TR, Datasheet Link=https://pdf1.alldatasheet.com/datasheet-pdf/view/224033/SGMICRO/SGM3157YC6/TR.html, Height=1.1mm
SW1 SW2 SW3 SW4 SW5: "Switch", Manufacturer_Name=XUNPU, Datasheet Link=https://www.xunpudianzi.com/uploads/pdf/TS-1088-ARXXX.pdf, Height=2mm, Manufacturer_Part_Number=TS-1088-AR02016
USB1: Core Colour=黑色, Current Rating - Power (Max)=5A, JLCPCB Part Class="Extended Part", LCSC Part Name="Type-C 母 卧贴", Manufacturer="SHOU HAN(首韩)", Operating Temperature Range=-25℃~+85℃, Rated Voltage (Max)=5V, Add into BOM=yes, Connect-Disconnect Life=5千次, Connector Type=Type-C, Convert to PCB=yes, Datasheet=https://atta.szlcsc.com/upload/public/pdf/source/20211123/39B17C16241EAC15C5E277BDA434118E.pdf, Device="TYPE-C 16PIN 2MD(073)", Gender=母, Manufacturer Part="TYPE-C 16PIN 2MD(073)", Mounting Style=卧贴, Number of Contacts=16P, Number of Ports=1, Standard="USB 3.1", Supplier=LCSC, Supplier Footprint=SMD, Supplier Part=C2765186, Symbol="TYPE-C 16PIN 2MD(073)"
Y1 Y2: "Crystal or Oscillator", Manufacturer_Name="Yangxing Tech", Height=0.8mm
  Y1: Datasheet Link=https://datasheet.lcsc.com/szlcsc/Yangxing-Tech-X322516MLB4SI_C13738.pdf, Manufacturer_Part_Number=X322516MLB4SI
  Y2: Datasheet Link=https://datasheet.lcsc.com/szlcsc/Yangxing-Tech-X322540MPB4SI_C9010.pdf, Manufacturer_Part_Number=X322540MPB4SI
BTB1 BTB2: System=Connector

## Free pads (board coordinates)
  round 3.2 hole 2.2: 1(4,44) 2(4,4) 3(68,4) 4(68,44)
  rect 0.889x0.889 smd rot 135: 5(5.664,30.253)

## Via types
v1: diameter 0.406, hole 0.3, SIG1 to SIG3, 155 vias
v2: diameter 0.508, hole 0.305, SIG1 to SIG3, 119 vias
v3: diameter 0.813, hole 0.508, SIG1 to SIG3, 58 vias
v4: diameter 0.61, hole 0.305, SIG1 to SIG3, 33 vias
v5: diameter 0.914, hole 0.508, SIG1 to SIG3, 13 vias
v6: diameter 1.219, hole 0.813, SIG1 to SIG3, 5 vias
v7: diameter 1.219, hole 0.762, SIG1 to SIG3, 5 vias
v8: diameter 0.457, hole 0.254, SIG1 to SIG3, 4 vias
v9: diameter 1.2, hole 1.2, SIG1 to SIG3, 2 vias
v10: diameter 0.8, hole 0.8, SIG1 to SIG3, 2 vias
v11: diameter 0.508, hole 0.3, SIG1 to SIG3, 1 vias

## Nets (pads, with @x,y where several pads share a name; then routed paths per layer and width w, separated by ;. In a path a pad name is that pad's centre, name@x,y a point inside that pad or via, vN(x,y) a via of type N, cw(c..) or ccw(c..) an arc to the next point about the centre after c; other vN are vias at no path point)
1.1V_CORE: C38.2 C39.2 C40.2 C41.2 C42.2 IC1.21 IC1.59 IC1.106 IC1.149 | length 65.1
  SIG1 w0.305: C41.2@24.053,35.206 24.071,35.206 v4(24.096,35.18) ; C38.2@30.854,39.446 C40.2@32.207,39.446 ; C42.2@33.071,15.919 33.126,15.919 33.388,16.182 33.388,16.237 33.815,16.664 35.527,16.664 v1(35.76,16.896) ; IC1.21@35.675,18.58 35.675,17.008 35.712,16.971 v1@35.712,16.943
  PWR w0.305: v4(24.096,35.18) 24.105,35.18 24.841,34.444 24.841,31.599 27.886,28.554 28.168,28.554 28.306,28.417 28.679,28.417 v1(28.699,28.397) ; v1@28.699,28.449 36.012,28.449 ; v2(32.207,39.473) 32.246,39.512 36.041,39.512 37.643,37.91 37.643,36.748 v1(36.652,35.758) 36.646,35.752 36.646,29.291 36.012,28.657 ; v1(35.76,16.896) 35.76,16.924 36.093,17.257 36.093,20.05 36.271,20.228 36.271,27.536 36.012,27.795 36.012,28.449 ; v2(47.667,29.086) 47.191,28.611 47.191,28.383 46.75,27.941 46.236,27.941 45.396,27.101 45.396,26.981 44.222,25.808 v1(43.231,25.808) 43.211,25.788 38.881,25.788 36.116,28.553 36.012,28.657 ; 36.012,28.449 36.012,28.657
1.5V_LOGIC: C18.2 C33.2 C34.2 C35.2 C36.2 C37.2 IC1.20 IC1.60 IC1.105 IC1.148 Q2.3 R27.2 | length 81.5
  SIG1 w0.305: C37.2@24.053,33.758 24.053,33.703 24.618,33.138 24.618,33.129 24.9,32.848 24.9,29.534 25.671,28.763 IC1.148@26.232,28.763 ; v4(29.108,15.797) C34.2@29.108,15.919 ; C33.2@33.575,39.446 34.991,39.446 35.485,38.952 35.485,38.942 35.7,38.726 36.18,38.726 36.987,37.919 36.987,37.032 IC1.105@36.975,37.02 36.975,37.078 v1(36.982,37.085) ; IC1.20@35.35,20.08 v4(35.35,20.897) ; IC1.60@45.638,26.208 46.227,26.208 46.836,26.817 46.836,26.843 47.579,27.586 C35.2@47.676,27.586
  SIG1 w0.635: R27.2@23.584,4.472 23.609,4.446 25.477,4.446 C18.2@25.502,4.421 25.502,4.476 25.937,4.911 25.937,5.086 26.568,5.716 26.805,5.716 Q2.3@26.938,5.849 ; v5(25.908,8.104) 25.961,8.051 25.961,7.876 26.938,6.899 Q2.3@26.938,5.849 ; Q2.3@26.938,6.374 Q2.3@26.938,5.849
  PWR w0.508: v4(29.108,15.797) 33.655,15.797 35.403,17.545 35.403,17.581 35.491,17.669 35.491,20.147 35.369,20.268 35.369,20.877 v4(35.35,20.897)
  PWR w0.635: v5(25.908,8.104) 27.737,9.933 27.737,14.426 v4(29.108,15.797)
  SIG3 w0.305: v1(26.487,28.811) 27.33,28.811 27.674,29.154 28.163,29.154 28.7,29.692 30.94,29.692 35.35,25.281 ; v4(35.35,20.897) 35.35,23.546 35.35,24.379 ; v1(36.982,37.085) 36.963,37.066 36.963,37.007 35.921,35.965 35.797,35.965 35.392,35.56 35.392,34.755 35.558,34.59 35.558,27.888 35.35,27.681 35.35,25.281 ; v1(45.618,26.189) 44.196,26.189 43.326,27.059 38.03,27.059 35.35,24.379 ; 35.35,24.379 35.35,25.281
2.5V_FLASH: C30.2 C31.2 C32.2 IC1.19 | length 7.1
  SIG1 w0.305: C32.2@31.75,13.26 C31.2@31.75,14.556 31.75,15.919 32.647,16.816 33.321,16.816 33.626,17.121 34.646,17.121 35.037,17.513 IC1.19@35.037,18.032